# Altium PCB 7798-20-0228.PcbDoc
Units mil, origin at the board's own origin, x right, y up, seen from the top; angles counter-clockwise.
Board outline 3346.46 x 2125.98 mil, 6 copper layers (Top Signal, Ground Plane (GND), Inner Layer 1, Inner Layer 2, Power Plane (VCC), Bottom Signal), stack 51.068 mil thick; 154 components, 100 nets, 626 pads, 170 vias.
Unrouted connection lines stored in the file: 294.
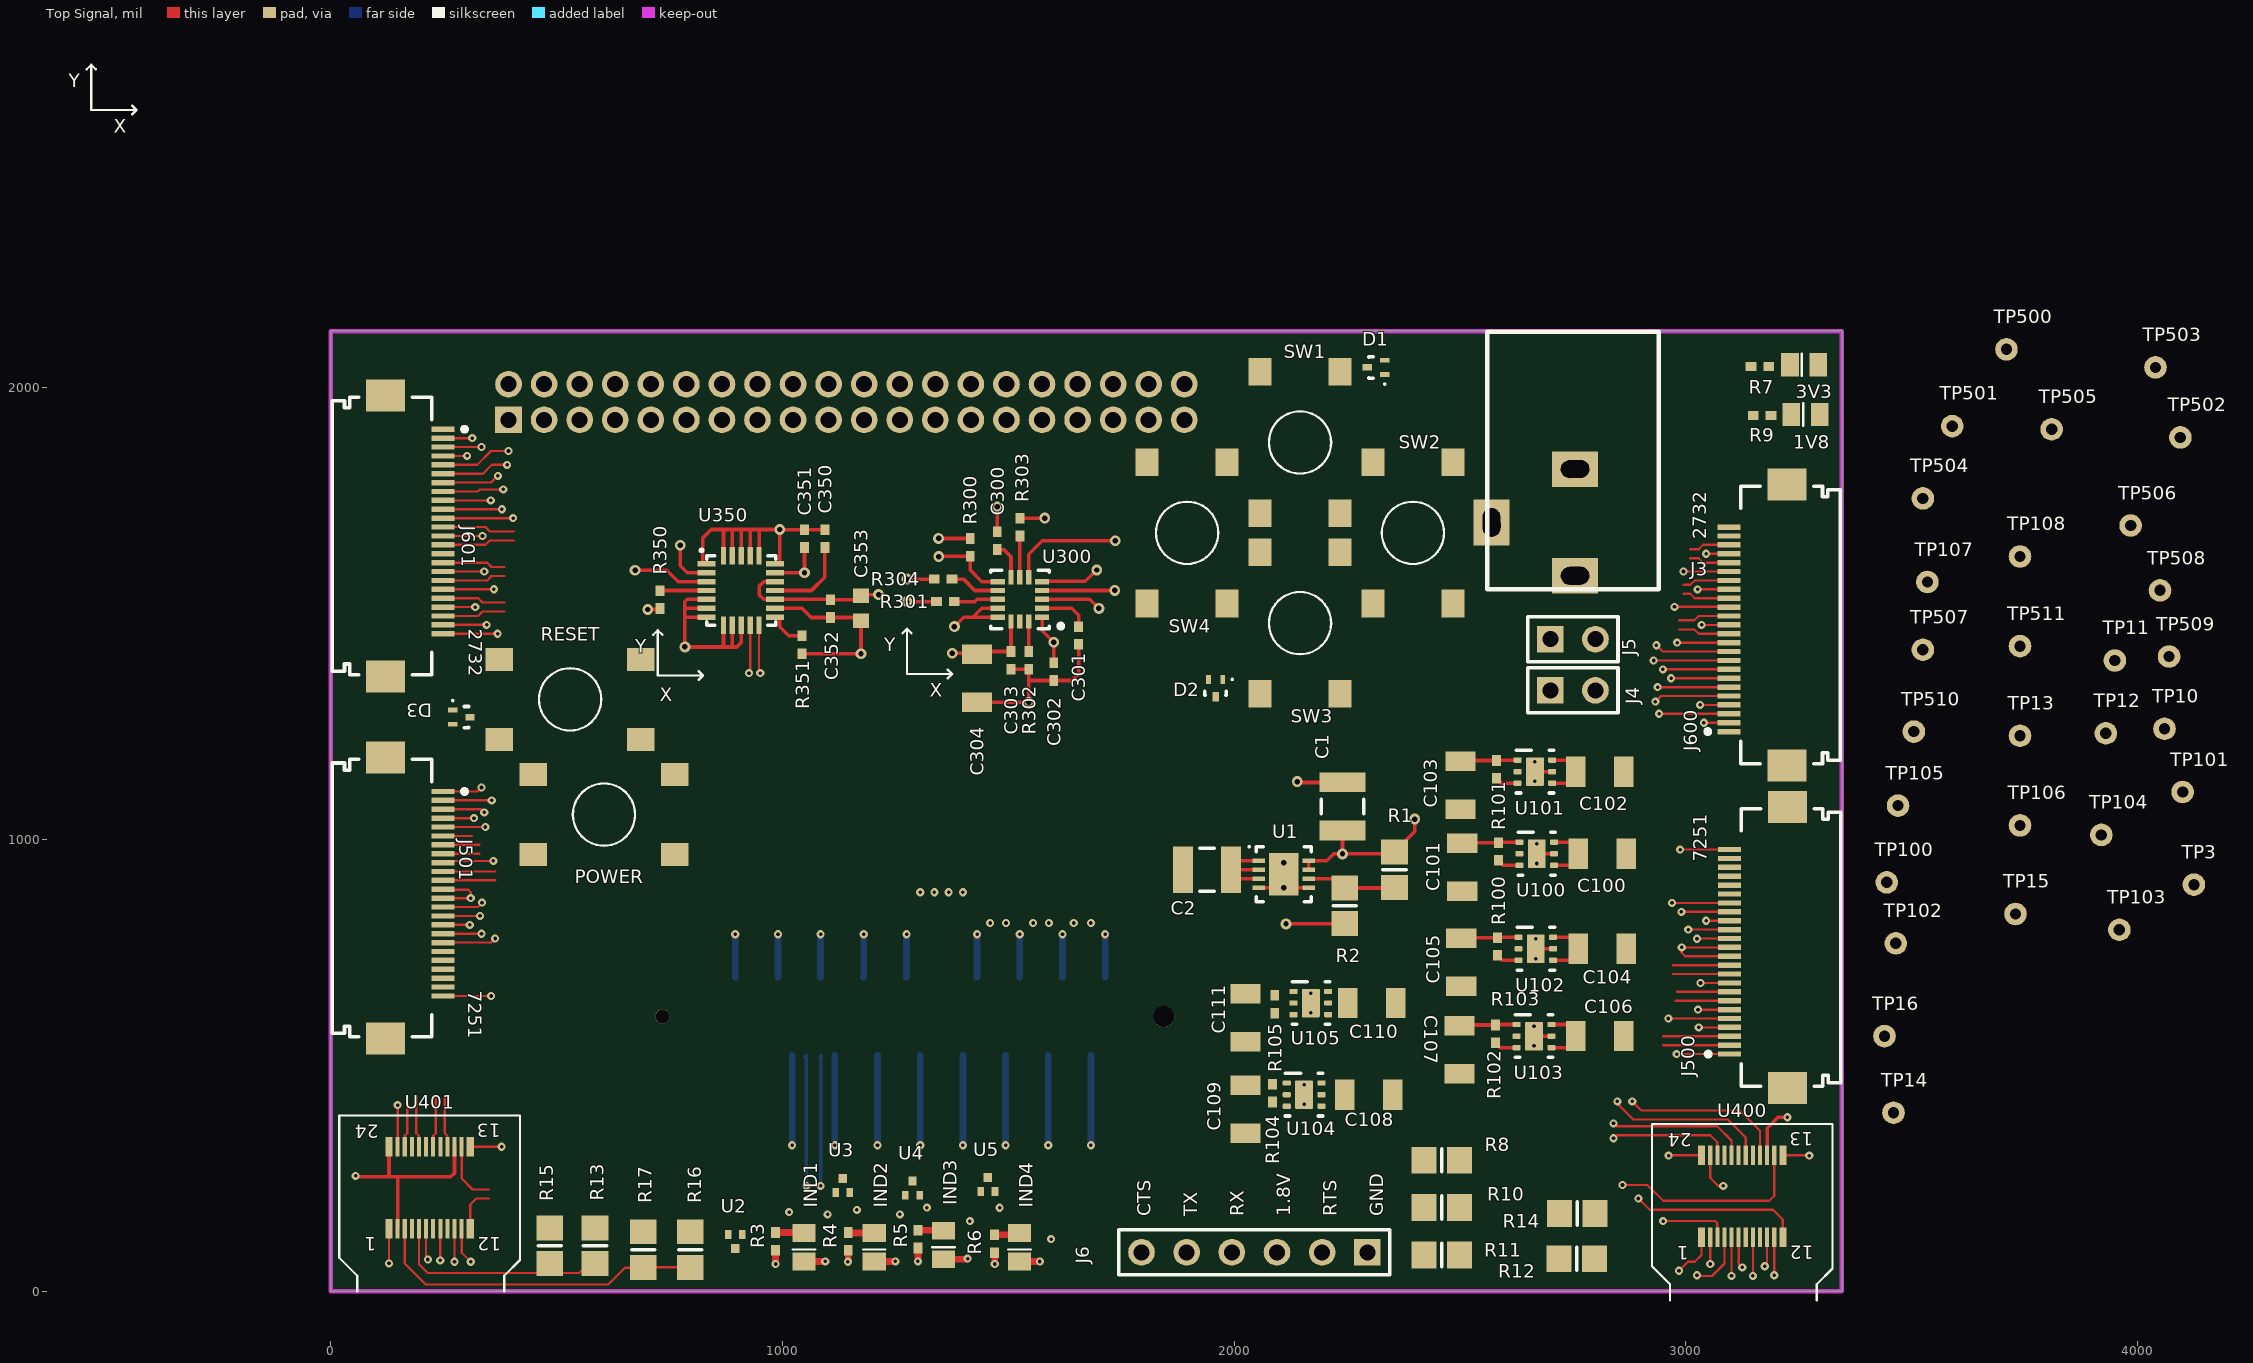
[diagram p0: Top Signal view]
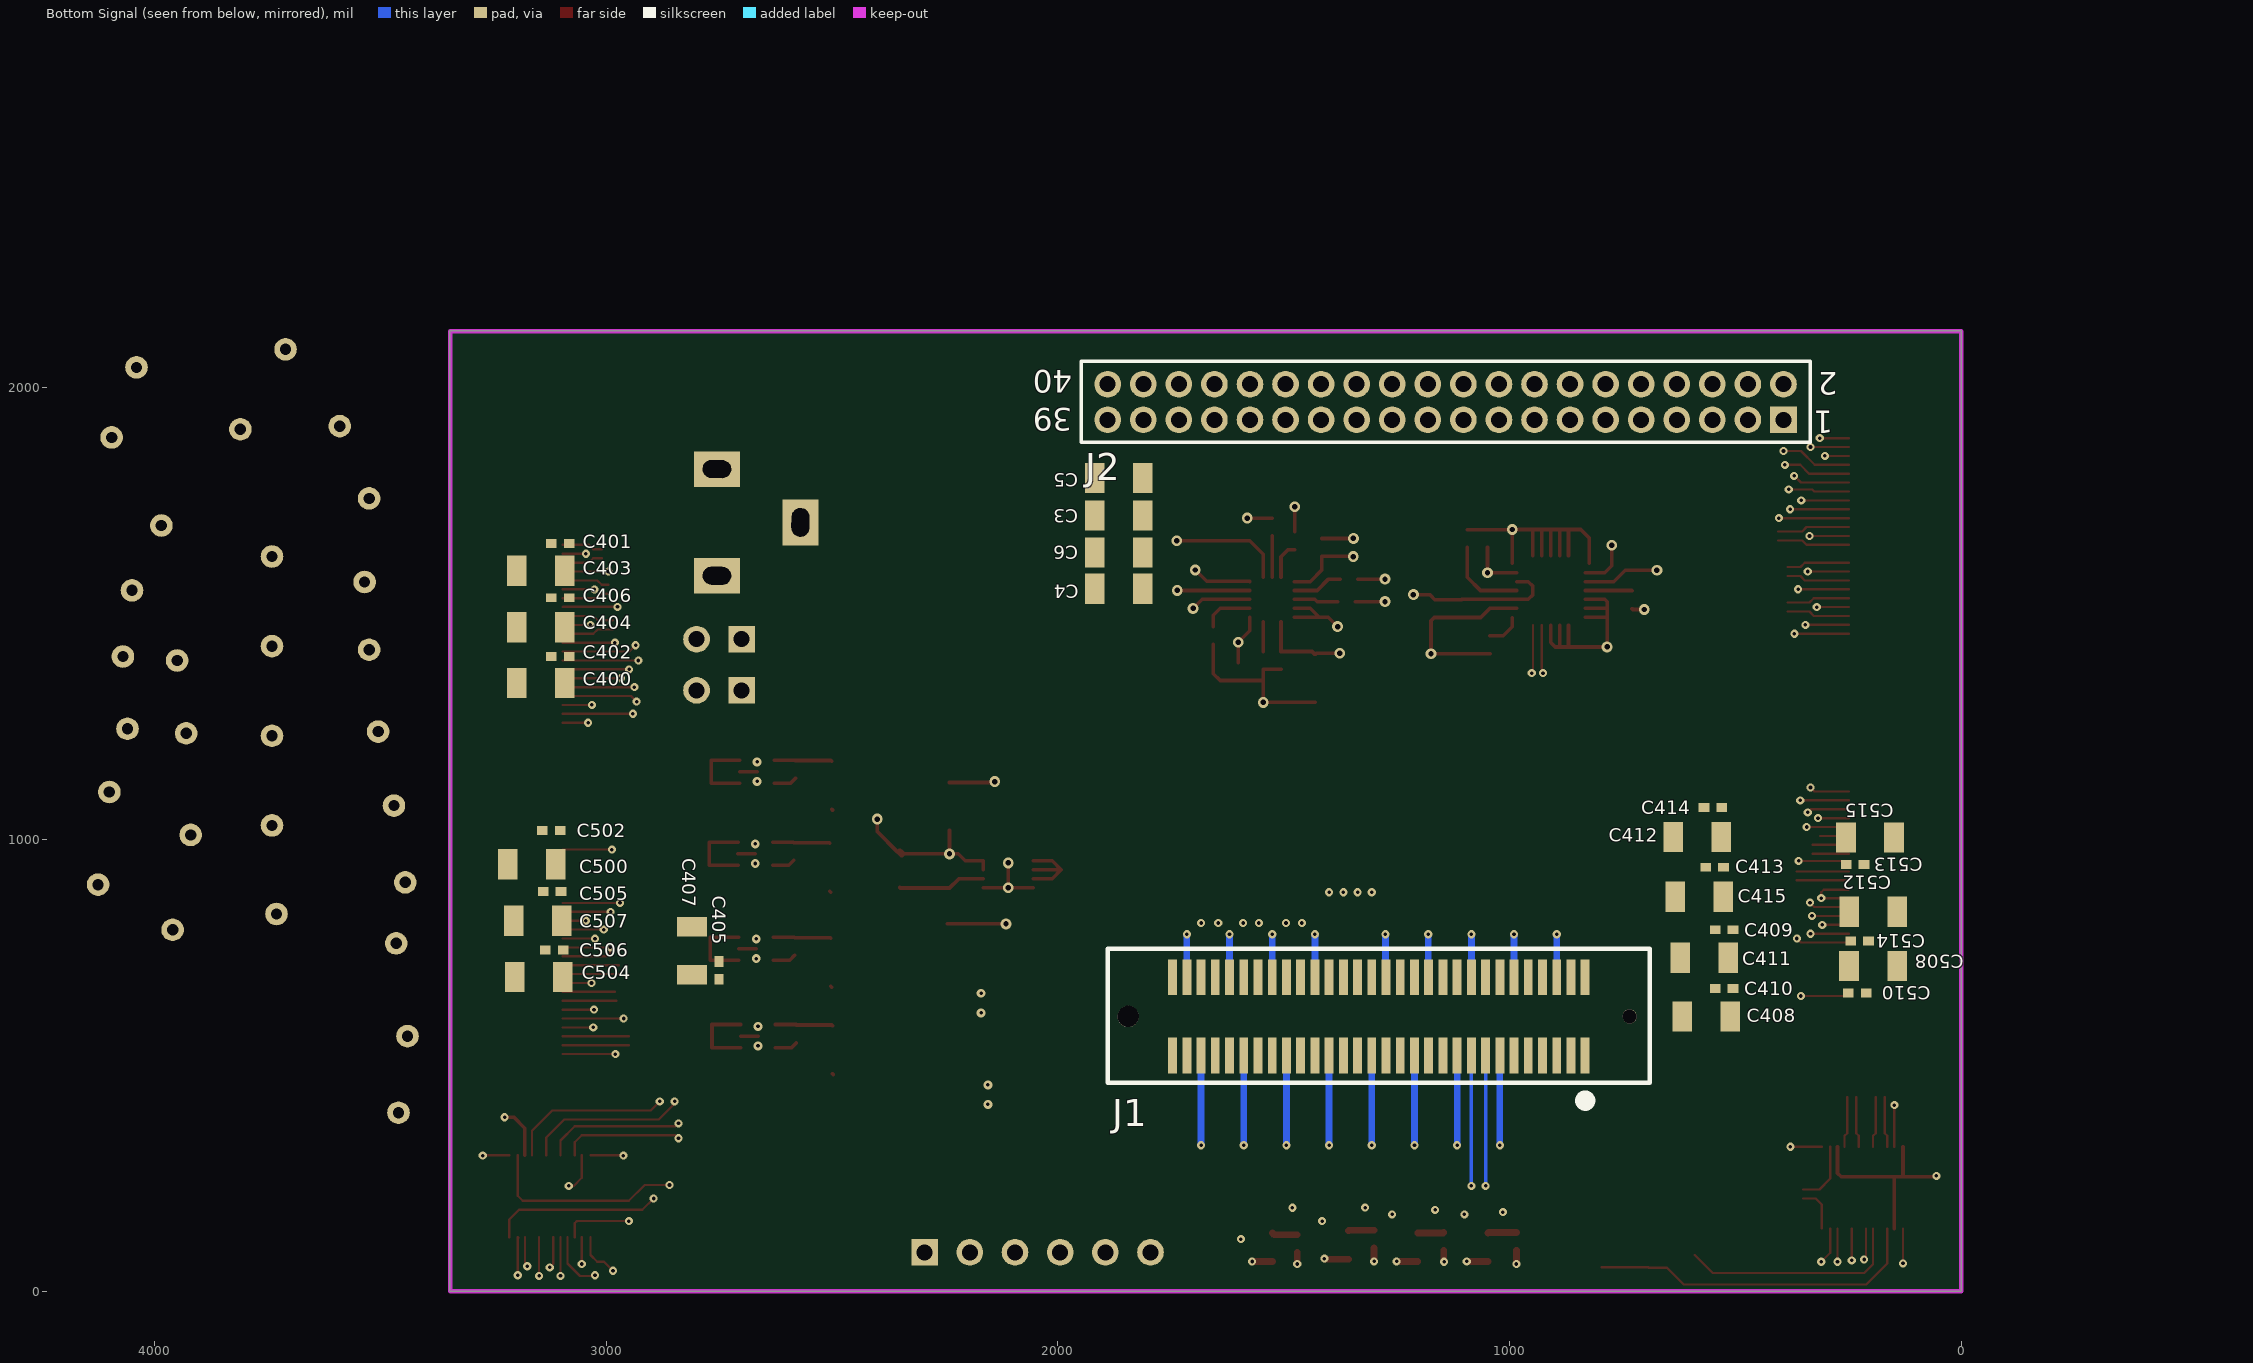
[diagram p1: Bottom Signal view, seen from below]
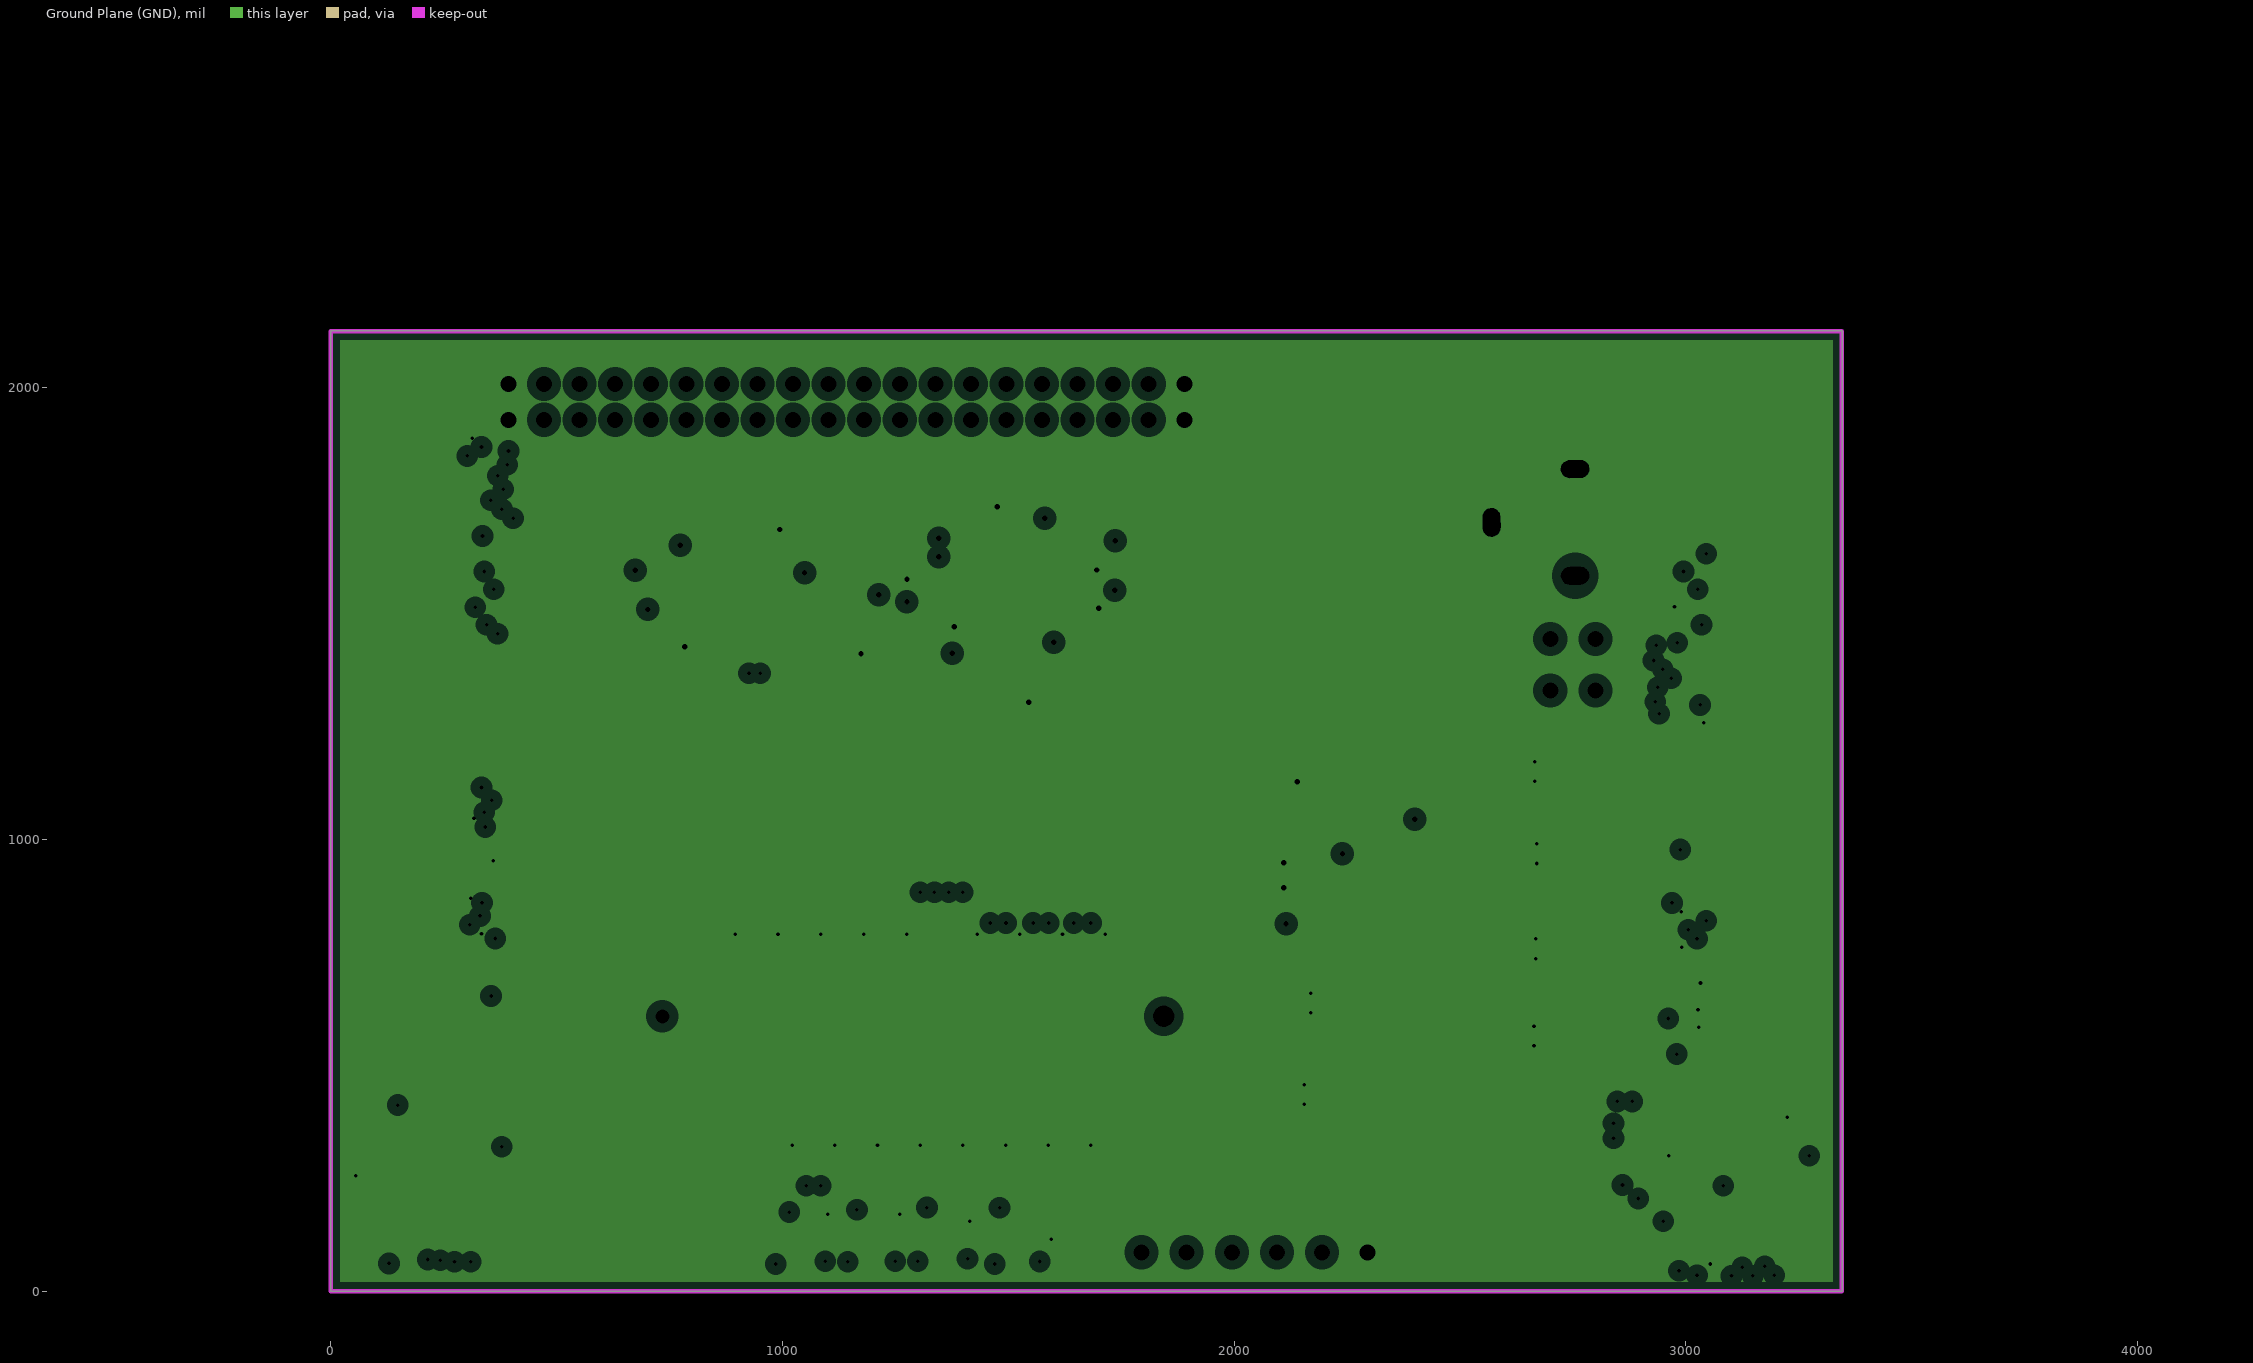
[diagram p2: Ground Plane (GND), clearances drawn from the general rule]
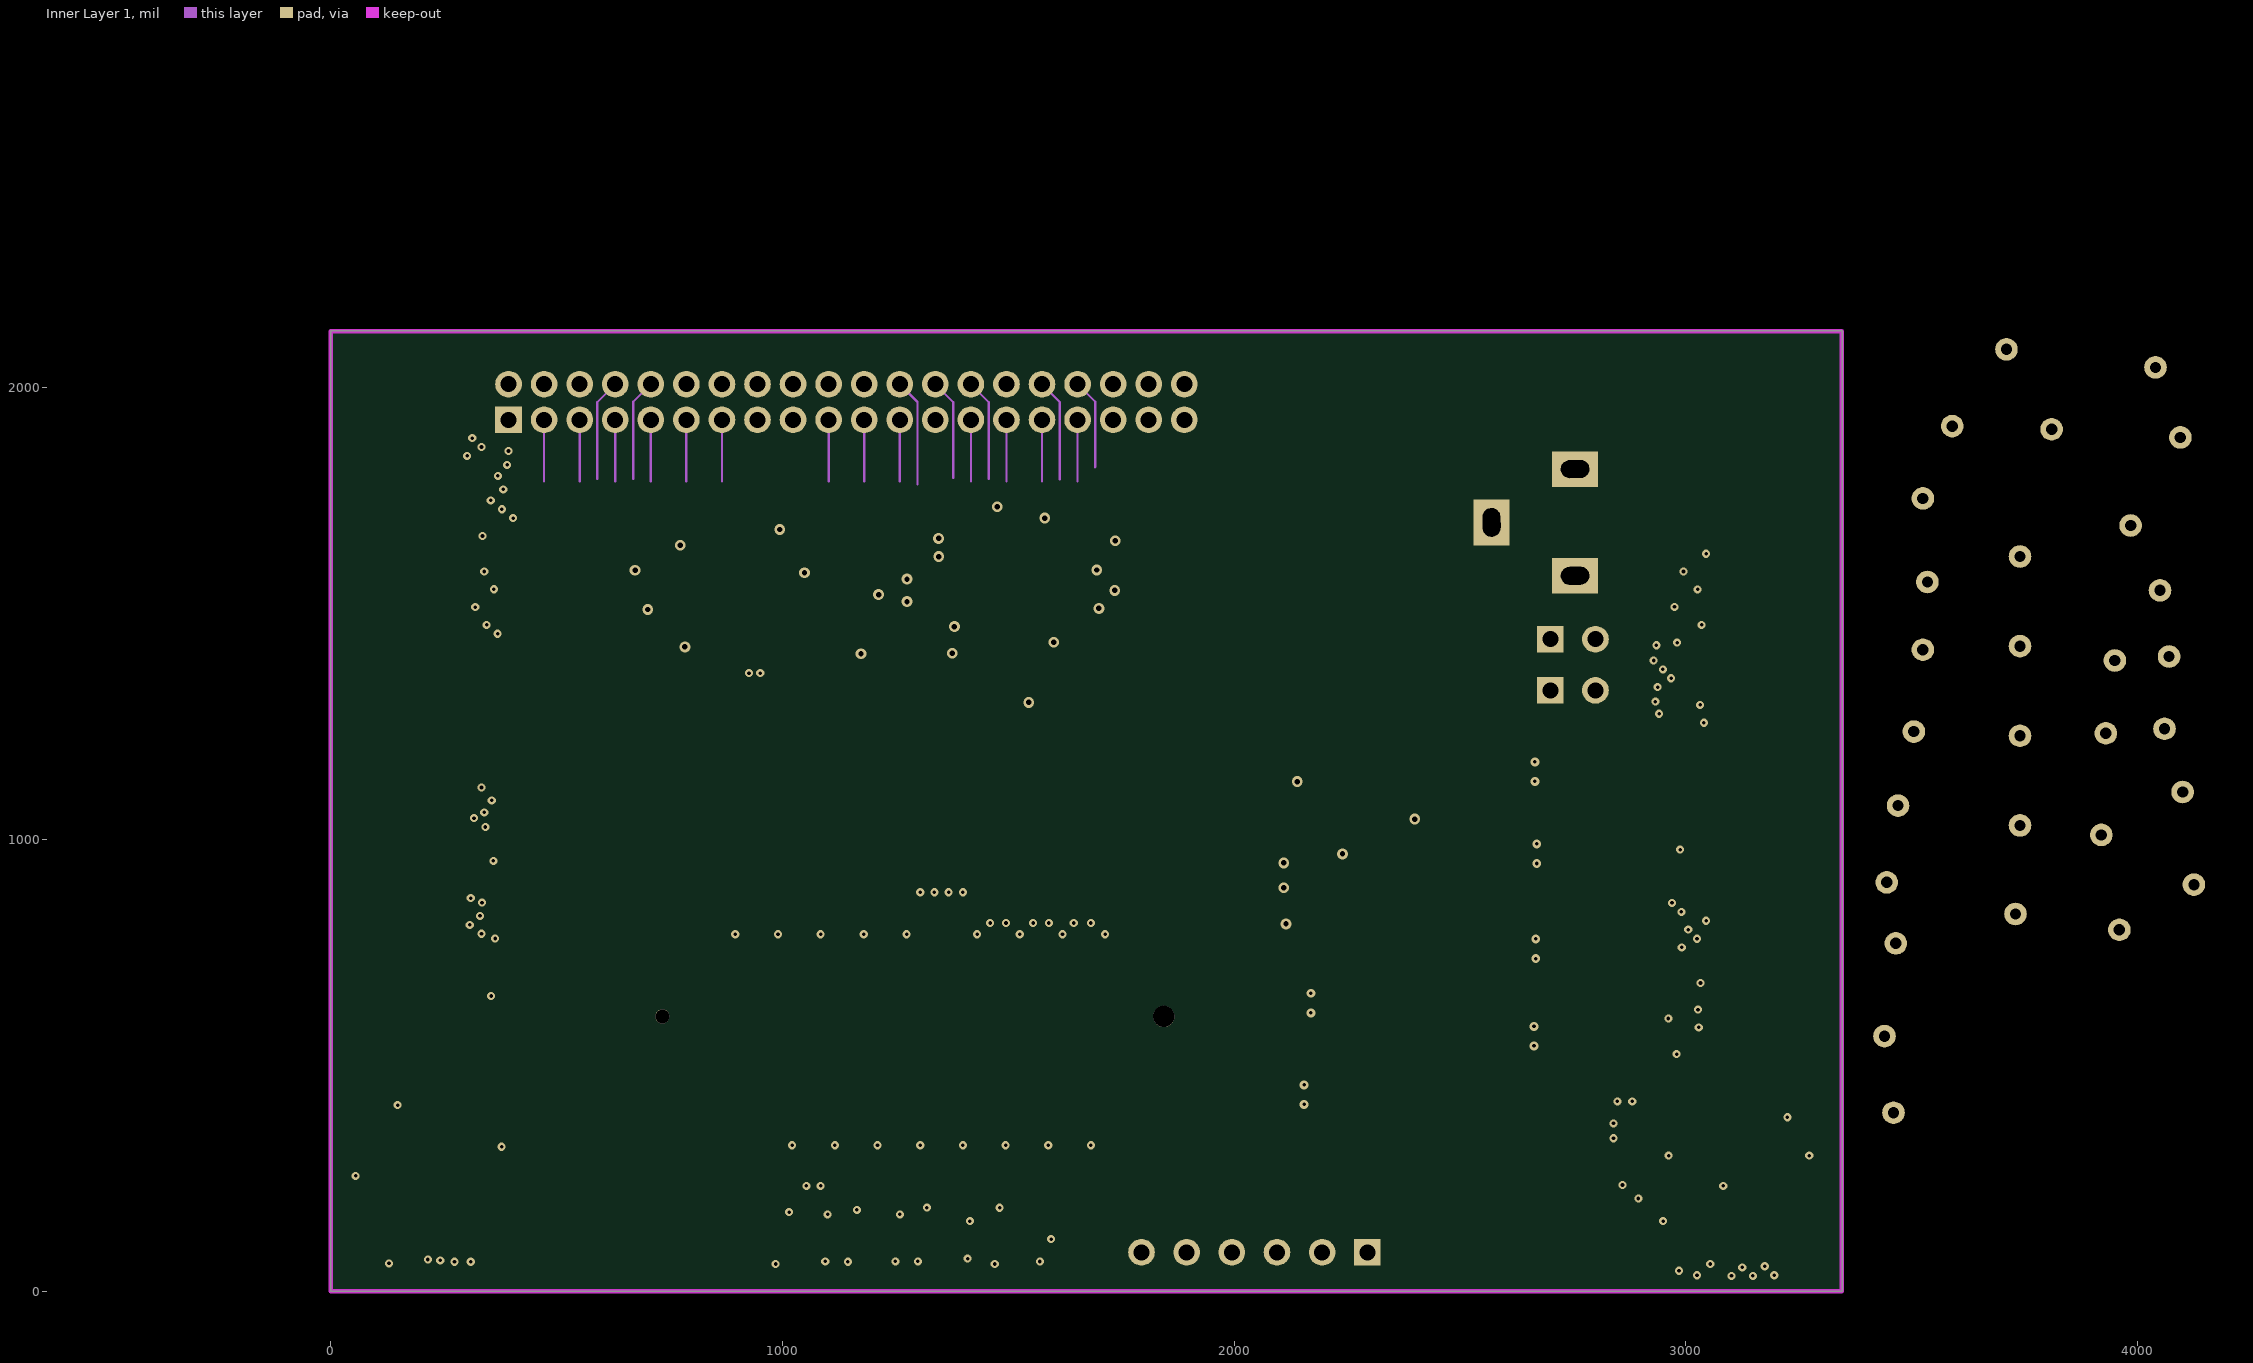
[diagram p3: Inner Layer 1]
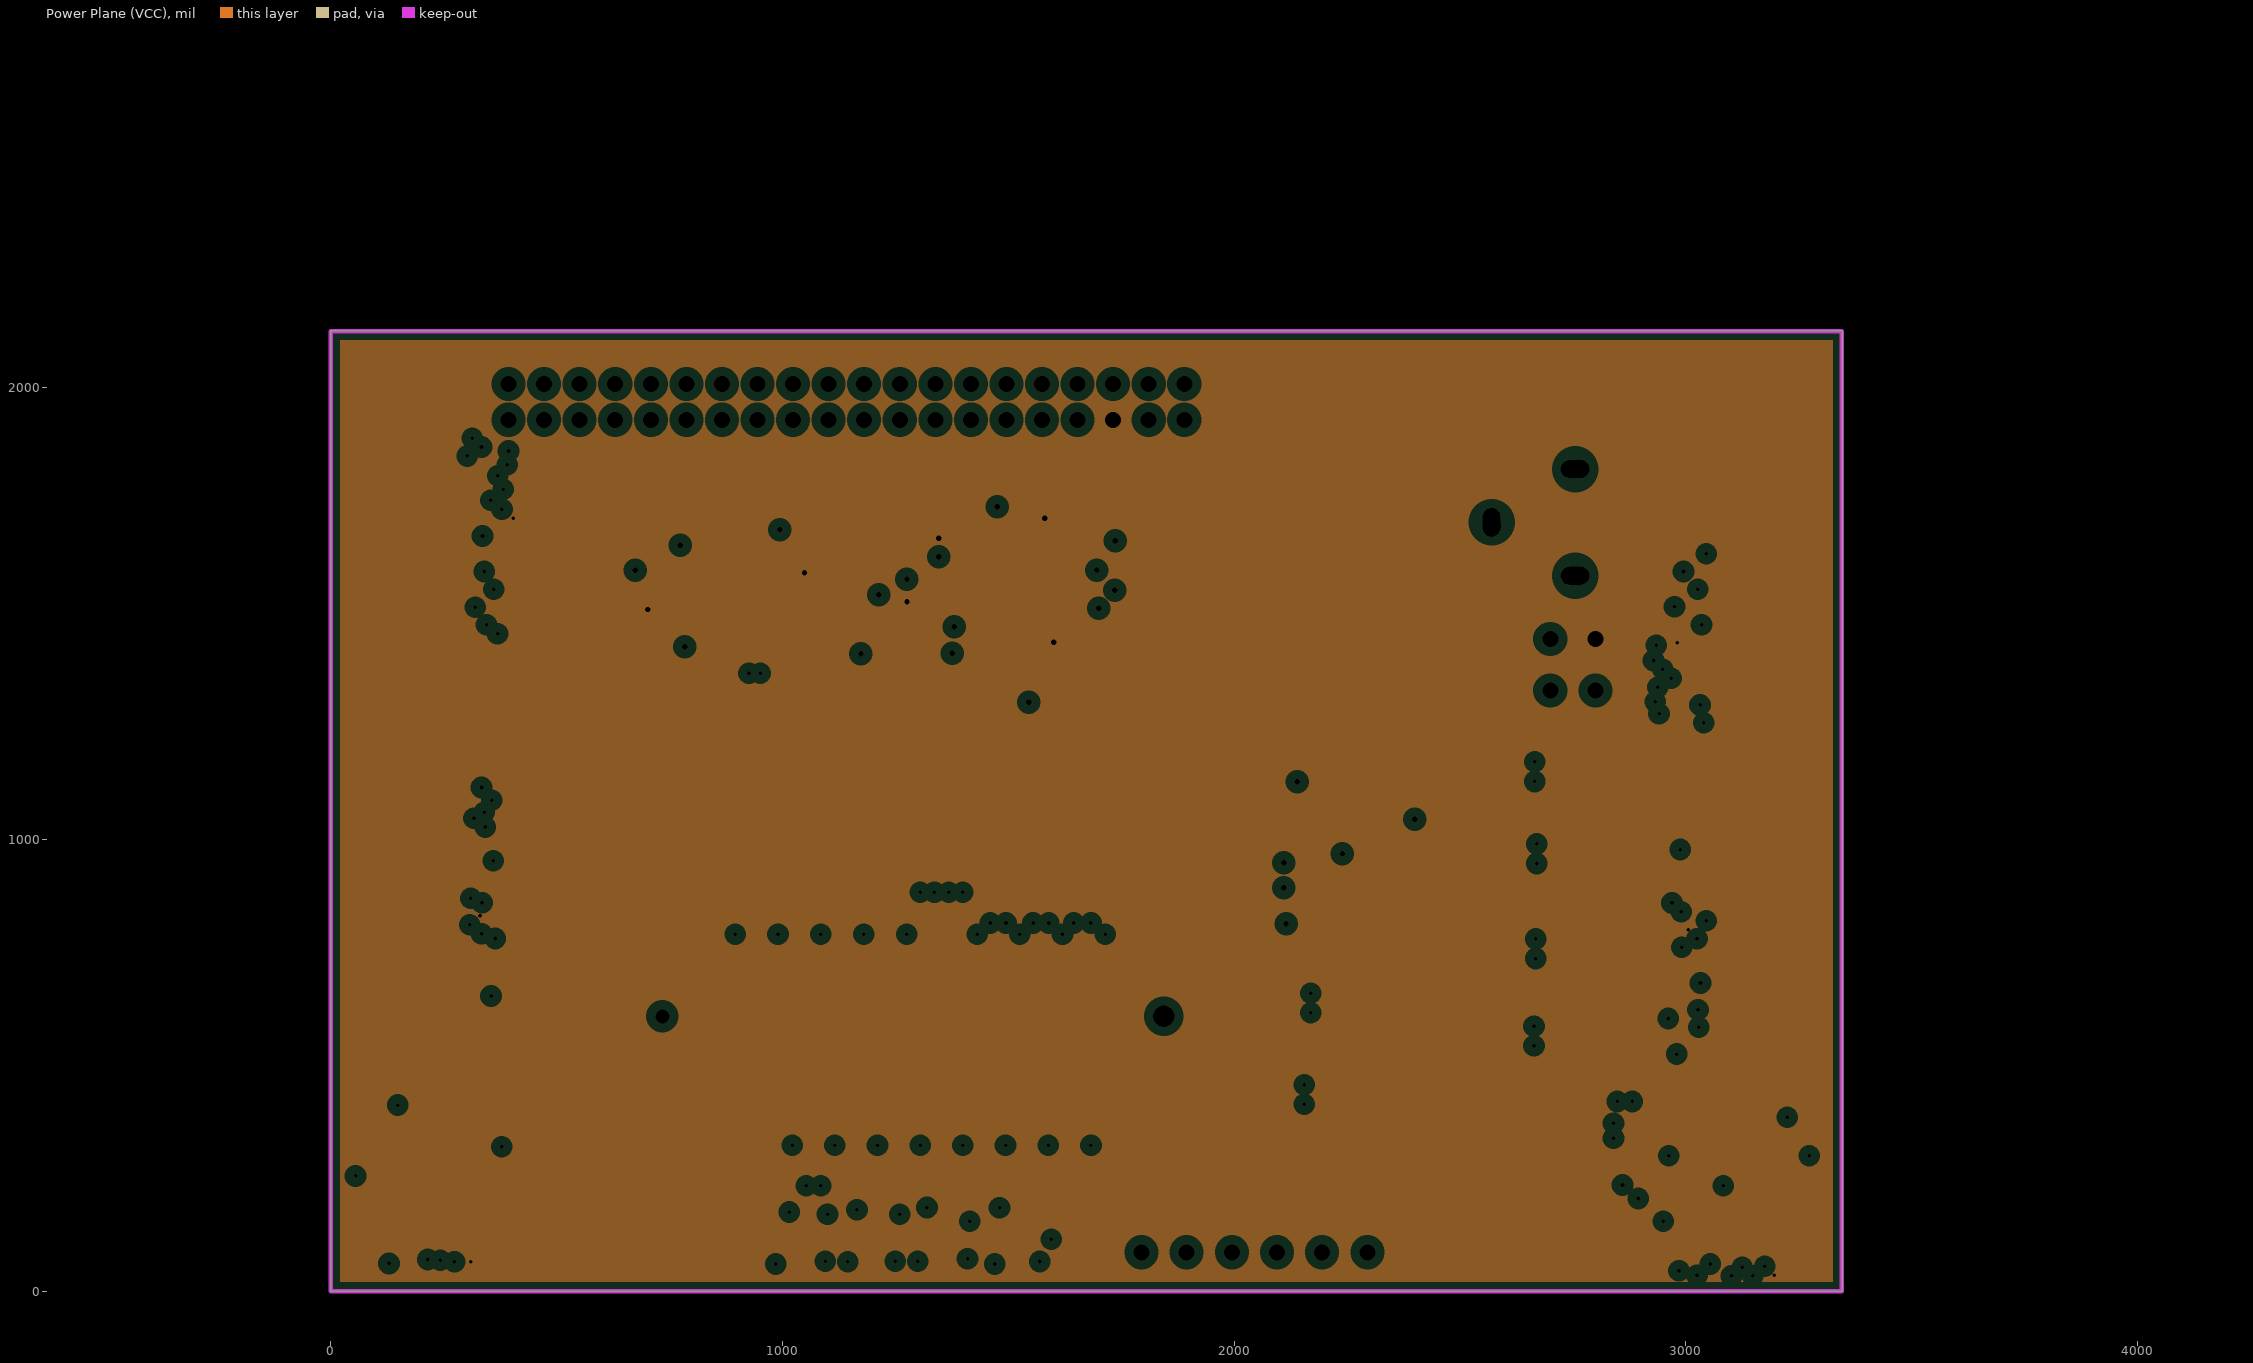
[diagram p4: Power Plane (VCC), clearances drawn from the general rule]

## Layer stack, top to bottom
Top Solder: solder mask 0.4, Solder Resist, Dk 3.5
Top Signal: signal copper 1.4
Dielectric 1: core 12.6, FR-4, Dk 4.8
Ground Plane (GND): plane copper 1.417, net sGND
Dielectric 3: prepreg 5, Dk 4.2
Inner Layer 1: signal copper 1.417
Dielectric 6: core 10, Dk 4.2
Inner Layer 2: signal copper 1.417
Dielectric 5: prepreg 5, Dk 4.2
Power Plane (VCC): plane copper 1.417, net sPWR_1V8
Dielectric 4: core 10, Dk 4.2
Bottom Signal: signal copper 1.4
Bottom Solder: solder mask 0.4, Solder Resist, Dk 3.5

## Board outline
0,0 3346.46,0 3346.46,2125.98 0,2125.98

## Design rules (kind name [scope] priority, off if disabled: settings)
AcuteAngle [All] p1: minimum=6.00000000000000E+0001 checktracksonly=FALSE
Clearance Clearance_2 [InNet('SCAM0_DATA0_N') OR InNet('SCAM0_DATA0_P') OR InNet('SCAM0_DATA1_N')OR InNet('SCAM0_DATA1_P') OR InNet('SCAM1_MCLOCK_N')OR InNet('SCAM1_MCLOCK_P') OR InNet('SCAM1_DATA0_N') OR InNet('SCAM1_DATA0_P')OR InNet('SCAM1_DATA1_N')OR InNet('SCAM1_DATA1_P') vs InNet('SCAM0_DATA0_N') OR InNet('SCAM0_DATA0_P') OR InNet('SCAM0_DATA1_N')OR InNet('SCAM0_DATA1_P') OR InNet('SCAM1_MCLOCK_N')OR InNet('SCAM1_MCLOCK_P') OR InNet('SCAM1_DATA0_N') OR InNet('SCAM1_DATA0_P')OR InNet('SCAM1_DATA1_N')OR InNet('SCAM1_DATA1_P')] p1: gap=15
Clearance Clearance_1 [(HasFootprint('SMD QFN 24_4X4MM 7/5') OR HasFootprint('FREE-QFN-16-3000X3000DE_V'))] p2: gap=8
Clearance [All] p3: gap=7
DiffPairsRouting DiffPair_SCAM0DiffPairsRouting [InDifferentialPair ('SCAM1_DATA0')] p1: maxlimit=10 minlimit=10 mostfreqgap=10 toplayer_minwidth=15 toplayer_maxwidth=15 toplayer_prefwidth=15 midlayer1_minwidth=15 midlayer1_maxwidth=15 midlayer1_prefwidth=15 midlayer2_minwidth=15 midlayer2_maxwidth=15 midlayer2_prefwidth=15 bottomlayer_minwidth=15 bottomlayer_maxwidth=15 bottomlayer_prefwidth=15 maxuncoupledlength=500
DiffPairsRouting [All] p2: maxlimit=17 minlimit=8 mostfreqgap=15 toplayer_minwidth=5 toplayer_maxwidth=10 toplayer_prefwidth=7 midlayer1_minwidth=5 midlayer1_maxwidth=10 midlayer1_prefwidth=7 midlayer2_minwidth=5 midlayer2_maxwidth=10 midlayer2_prefwidth=7 bottomlayer_minwidth=5 bottomlayer_maxwidth=10 bottomlayer_prefwidth=7 maxuncoupledlength=500
MatchedLengths DiffPair_SCAM0MatchedLengths [InDifferentialPair ('SCAM1_DATA0')] p1: tolerance=26 checknetsindiffpair=FALSE checkdiffpairvsdiffpair=TRUE checkxsignals=TRUE checkothers=TRUE
MatchedLengths [InDifferentialPairClass('All Differential Pairs')] p2: tolerance=26 checknetsindiffpair=TRUE checkdiffpairvsdiffpair=FALSE checkxsignals=FALSE checkothers=FALSE
MaxMinImpedance [InNet('SCAM0_DATA0_N') OR InNet('SCAM0_DATA0_P') OR InNet('SCAM0_DATA1_N')OR InNet('SCAM0_DATA1_P') OR InNet('SCAM1_MCLOCK_N')OR InNet('SCAM1_MCLOCK_P') OR InNet('SCAM1_DATA0_N') OR InNet('SCAM1_DATA0_P')OR InNet('SCAM1_DATA1_N')OR InNet('SCAM1_DATA1_P')] p1: minimum=10.00 maximum=110.0
MinimumAnnularRing [All] p1: minimumring=10
PlaneClearance [All] p1: clearance=20
PlaneConnect [All] p1: planeconnectstyle=Relief reliefexpansion=20 reliefentries=4 reliefconductorwidth=10 reliefairgap=10
PolygonConnect [All] p1: connectstyle=Relief reliefconductorwidth=10 reliefentries=4 polygonreliefangle="90 Angle" airgapwidth=10
RoutingVias [All] p1: holewidth=10 width=20 viastyle="Through Hole" minholewidth=8 minwidth=18 maxholewidth=12 maxwidth=24
SolderMaskExpansion [All] p1: expansion=4
Width Width_2 [InNet('SCAM0_DATA0_N') OR InNet('SCAM0_DATA0_P') OR InNet('SCAM0_DATA1_N')OR InNet('SCAM0_DATA1_P') OR InNet('SCAM1_MCLOCK_N')OR InNet('SCAM1_MCLOCK_P') OR InNet('SCAM1_DATA0_N') OR InNet('SCAM1_DATA0_P')OR InNet('SCAM1_DATA1_N')OR InNet('SCAM1_DATA1_P')] p1: maxlimit=10 minlimit=5 preferedwidth=7
Width Width_1 [InNet('sSYS_DCIN')] p2: maxlimit=30 minlimit=8 preferedwidth=8
Width [All] p3: maxlimit=15 minlimit=5 preferedwidth=8
27 further rules are at their usual default settings.

## Classes and differential pairs
differential pair SCAM0_DATA0: +SCAM0_DATA0_P -SCAM0_DATA0_N
differential pair SCAM0_DATA1: +SCAM0_DATA1_P -SCAM0_DATA1_N
differential pair SCAM1_DATA1: +SCAM1_DATA1_P -SCAM1_DATA1_N
differential pair SCAM1_MCLOCK: +SCAM1_MCLOCK_P -SCAM1_MCLOCK_N

## Components (designator, comment, footprint, x,y, rotation, side; value= is the part's Value field where it differs from the comment)
1V8 "LTST-C171GKT" 0805 3265,1941 r180 top
3V3 "LTST-C171GKT" 0805 3262,2051 r180 top
C1 "GRM32ER71H106KA12L" 1210 2240,1073 r270 top
C2 "GRM32ER71H106KA12L" 1210 1940,932.84 r0 top
C3 "GRM31CR71H475KA12L" 1206 1865,1717.28 r180 bottom
C4 "GRM31CR71H475KA12L" 1206 1865,1555 r180 bottom
C5 "GRM31CR71H475KA12L" 1206 1865,1800 r180 bottom
C6 "GRM31CR71H475KA12L" 1206 1865,1635 r180 bottom
C100 "GRM31CR71H475KA12L" 1206 2815,968.43 r180 top
C101 "GRM31CR71H475KA12L" 1206 2505,938.35 r90 top
C102 "GRM31CR71H475KA12L" 1206 2810,1150.06 r180 top
C103 "GRM31CR71H475KA12L" 1206 2501,1120.06 r90 top
C104 "GRM31CR71H475KA12L" 1206 2815,758 r180 top
C105 "GRM31CR71H475KA12L" 1206 2503,728 r90 top
C106 "GRM31CR71H475KA12L" 1206 2810,565 r180 top
C107 "GRM31CR71H475KA12L" 1206 2499,534.58 r90 top
C108 "GRM31CR71H475KA12L" 1206 2298.15,435 r180 top
C109 "GRM31CR71H475KA12L" 1206 2025,403 r90 top
C110 "GRM31CR71H475KA12L" 1206 2305,637.72 r180 top
C111 "GRM31CR71H475KA12L" 1206 2025,605.38 r90 top
C300 "GRM155R71A104KA01D" 0402 1475.79,1661.46 r90 top
C301 "GRM155R71A104KA01D" 0402 1655.79,1451.46 r270 top
C302 "GRM155R71A104KA01D" 0402 1600.79,1371.46 r90 top
C303 "GRM155R71A104KA01D" 0402 1506.1,1396.46 r90 top
C304 "GRM31CR71H475KA12L" 1206 1430.79,1356.46 r90 top
C350 "GRM155R71A104KA01D" 0402 1094,1666.15 r90 top
C351 "GRM155R71A104KA01D" 0402 1049,1666.15 r270 top
C352 "GRM155R71A104KA01D" 0402 1106.13,1511.15 r90 top
C353 "GRM188R71A105KA61J" 0603 1174,1511.78 r270 top
C400 "GRM31CR71H475KA12L" 1206 3145.12,1346.15 r0 bottom
C401 "GRM155R71A104KA01D" 0402 3101.81,1655 r180 bottom
C402 "GRM155R71A104KA01D" 0402 3101.81,1405 r180 bottom
C403 "GRM31CR71H475KA12L" 1206 3145.12,1595 r0 bottom
C404 "GRM31CR71H475KA12L" 1206 3145.12,1470 r0 bottom
C405 "GRM155R71A104KA01D" 0402 2750,710 r270 bottom
C406 "GRM155R71A104KA01D" 0402 3101.81,1535 r180 bottom
C407 "GRM31CR71H475KA12L" 1206 2810,753.15 r90 bottom
C408 "GRM31CR71H475KA12L" 1206 565,608.27 r0 bottom
C409 "GRM155R71A104KA01D" 0402 525,800 r180 bottom
C410 "GRM155R71A104KA01D" 0402 525,670 r180 bottom
C411 "GRM31CR71H475KA12L" 1206 569.18,738.31 r0 bottom
C412 "GRM31CR71H475KA12L" 1206 585,1005.37 r0 bottom
C413 "GRM155R71A104KA01D" 0402 546.18,938.31 r180 bottom
C414 "GRM155R71A104KA01D" 0402 549.96,1070.37 r180 bottom
C415 "GRM31CR71H475KA12L" 1206 580.32,873.31 r0 bottom
C500 "GRM31CR71H475KA12L" 1206 3165,945 r0 bottom
C502 "GRM155R71A104KA01D" 0402 3121.69,1020 r180 bottom
C504 "GRM31CR71H475KA12L" 1206 3149.37,695.43 r0 bottom
C505 "GRM155R71A104KA01D" 0402 3120,885 r180 bottom
C506 "GRM155R71A104KA01D" 0402 3115,755.43 r180 bottom
C507 "GRM31CR71H475KA12L" 1206 3151.85,820 r0 bottom
C508 "GRM31CR71H475KA12L" 1206 195.38,720 r180 bottom
C510 "GRM155R71A104KA01D" 0402 230.38,660 r0 bottom
C512 "GRM31CR71H475KA12L" 1206 195,840 r180 bottom
C513 "GRM155R71A104KA01D" 0402 235,944.45 r0 bottom
C514 "GRM155R71A104KA01D" 0402 225,775 r0 bottom
C515 "GRM31CR71H475KA12L" 1206 202.14,1004.45 r180 bottom
D1 "ESD7C5.0DT5G" ONSC-SOT-723-3-631AA-01_V 2314.29,2045 r180 top
D2 "ESD7C5.0DT5G" ONSC-SOT-723-3-631AA-01_V 1959,1335 r270 top
D3 "ESD7C5.0DT5G" ONSC-SOT-723-3-631AA-01_V 289.29,1270.75 r0 top
IND1 "LTST-C171GKT" 0805 1048,97 r270 top
IND2 "LTST-C171GKT" 0805 1203.33,97 r270 top
IND3 "LTST-C171GKT" 0805 1356.67,102 r270 top
IND4 "LTST-C171GKT" 0805 1525,97 r270 top
J1 "61083-064402LF" 61083-064402LF 832.68,521.65 r0 bottom locked
J2 "TMMH-120-01-F-D" HDR2X20.Metric 393.7,1929.13 r0 bottom locked
J3 "PJ-102AH" PJ-102AH 2755,1701.89 r0 top
J4 "XJ8B-0211" HDR1X2 2700,1330 r0 top
J5 "XJ8B-0211" HDR1X2 2700,1443.32 r0 top
J6 "DNP" HDR1X6 2295,86 r180 top
J500 "FH12-24S-0.5SH" FH12-24S-0.5SH 3161.02,761.02 r90 top
J501 "FH12-24S-0.5SH" FH12-24S-0.5SH 185,870 r270 top
J600 "FH12-24S-0.5SH" FH12-24S-0.5SH 3160,1475 r90 top
J601 "FH12-24S-0.5SH" FH12-24S-0.5SH 185,1671.89 r270 top
POWER "PTS645SH50SMTR92 LFS" "PTS645SH50SMTR92 LFS" 605,1055 r0 top
R1 "CRCW08050000Z0EA" 6-0805_M 2355,933 r90 top
R2 "CRCW08050000Z0EA" 6-0805_M 2245,853 r270 top
R3 "CRCW0402560RFKEDHP" 0402 985,110 r270 top
R4 "CRCW0402560RFKEDHP" 0402 1145.79,110 r270 top
R5 "CRCW0402560RFKEDHP" 0402 1300,115 r270 top
R6 "CRCW0402560RFKEDHP" 0402 1470,105 r270 top
R7 "CRCW0402560RFKEDHP" 0402 3164,2047 r180 top
R8 "CRCW08050000Z0EA" 6-0805_M 2460,290 r0 top
R9 "CRCW040256R0FKED" 0402 3169,1939 r180 top
R10 "CRCW08050000Z0EA" 6-0805_M 2460,185 r0 top
R11 "CRCW08050000Z0EA" 6-0805_M 2460,80 r0 top
R12 "CRCW08050000Z0EA" 6-0805_M 2759,72 r0 top
R13 "CRCW08050000Z0EA" 6-0805_M 585,100.63 r270 top
R14 "CRCW08050000Z0EA" 6-0805_M 2760,172 r0 top
R15 "CRCW08050000Z0EA" 6-0805_M 485,100.63 r270 top
R16 "CRCW08050000Z0EA" 6-0805_M 796,92 r270 top
R17 "CRCW08050000Z0EA" 6-0805_M 692,92 r270 top
R100 "CRCW040210K0FKEDHP" 0402 2585,973.35 r270 top
R101 "CRCW040210K0FKEDHP" 0402 2581,1155.06 r270 top
R102 "CRCW040210K0FKEDHP" 0402 2583,763 r270 top
R103 "CRCW040210K0FKEDHP" 0402 2579,569.58 r270 top
R104 "CRCW040210K0FKEDHP" 0402 2085,438.5 r270 top
R105 "CRCW040210K0FKEDHP" 0402 2090,635 r270 top
R300 "CRCW040210K0FKED" 0402 1415.79,1646.46 r270 top
R301 "CRCW040210K0FKED" 0402 1360.79,1526.46 r0 top
R302 "CRCW040210K0FKED" 0402 1545.47,1396.46 r90 top
R303 "CRCW040210K0FKED" 0402 1525.79,1691.46 r90 top
R304 "CRCW040210K0FKED" 0402 1355.79,1576.46 r180 top
R350 "CRCW040210K0FKED" 0402 729,1530.83 r90 top
R351 "CRCW040210K0FKED" 0402 1043.37,1431.15 r270 top
RESET "PTS645SH50SMTR92 LFS" "PTS645SH50SMTR92 LFS" 530,1310.17 r180 top
SW1 "PTS645SH50SMTR92 LFS" "PTS645SH50SMTR92 LFS" 2146,1878.89 r90 top
SW2 "PTS645SH50SMTR92 LFS" "PTS645SH50SMTR92 LFS" 2396,1678.89 r90 top
SW3 "PTS645SH50SMTR92 LFS" "PTS645SH50SMTR92 LFS" 2146,1478.89 r90 top
SW4 "PTS645SH50SMTR92 LFS" "PTS645SH50SMTR92 LFS" 1896,1678.89 r90 top
TP3 "TP" TP_TH 4125,900 r90 top
TP10 "TP" TP_TH 4060,1245 r90 top
TP11 "TP" TP_TH 3950,1396.26 r90 top
TP12 "TP" TP_TH 3930,1235 r90 top
TP13 "TP" TP_TH 3740,1229.5 r90 top
TP14 "TP" TP_TH 3460,395 r90 top
TP15 "TP" TP_TH 3730,835 r90 top
TP16 "TP" TP_TH 3440,564.58 r90 top
TP100 "TP" TP_TH 3445,905 r90 top
TP101 "TP" TP_TH 4100,1105 r90 top
TP102 "TP" TP_TH 3465,770 r90 top
TP103 "TP" TP_TH 3960,800 r90 top
TP104 "TP" TP_TH 3920,1010 r90 top
TP105 "TP" TP_TH 3470,1075 r90 top
TP106 "TP" TP_TH 3740,1031 r90 top
TP107 "TP" TP_TH 3535,1570 r90 top
TP108 "TP" TP_TH 3740,1626.5 r90 top
TP500 "TP" TP_TH 3710,2085 r90 top
TP501 "TP" TP_TH 3590,1915 r90 top
TP502 "TP" TP_TH 4095,1890 r90 top
TP503 "TP" TP_TH 4040,2045 r90 top
TP504 "TP" TP_TH 3525,1755 r90 top
TP505 "TP" TP_TH 3810,1908.11 r90 top
TP506 "TP" TP_TH 3985,1695 r90 top
TP507 "TP" TP_TH 3525,1420 r90 top
TP508 "TP" TP_TH 4050,1551.46 r90 top
TP509 "TP" TP_TH 4070,1405 r90 top
TP510 "TP" TP_TH 3505,1238.78 r90 top
TP511 "TP" TP_TH 3740,1428 r90 top
U1 "LT1965EDD-3.3#TRPBF" "LT-DD-8_V - MOD" 2110,923 r0 top
U2 "RUM002N05T2L" RUM002N05T2L 895.67,110 r180 top
U3 "RUM002N05T2L" RUM002N05T2L 1133.58,234 r0 top
U4 "RUM002N05T2L" RUM002N05T2L 1288,228 r0 top
U5 "RUM002N05T2L" RUM002N05T2L 1455,236 r0 top
U100 "LP5912-1.5" DRV0006A 2670,968.35 r0 top
U101 "LP5912-1.5" DRV0006A 2666,1150.06 r0 top
U102 "LP5912-2.8" DRV0006A 2668,758 r0 top
U103 "LP5912-2.8" DRV0006A 2664,564.58 r0 top
U104 "LP5912-1.2" DRV0006A 2155,435 r0 top
U105 "LP5912-1.2" DRV0006A 2170,637.72 r0 top
U300 "FXOS8700CQR1" FREE-QFN-16-3000X3000DE_V 1525.79,1531.46 r180 top
U350 "FXAS21002C" "SMD QFN 24_4X4MM 7/5" 909,1551.15 r0 top
U400 "AXK724147G" AXK724147G 3125,210 r180 top
U401 "AXK724147G" AXK724147G 219,229 r180 top

## Footprints (in the part's own frame and the unit in brackets; to place one, negate y for a bottom-side part, rotate by r counter-clockwise, add the part's x,y. Pads: shape width x height; smd on the part's side, far side on the other; paste and mask are expansions set on the pad)
6-0805_M [mm] "Chip Resistor, Body 2.0x1.2mm, IPC Low Density"
  rect 1.4x1.5 smd: 1(-1,0) 2(1,0)
  silkscreen extent 0,-0.65 0,0.65, body extent -1.07,-0.7 1.07,0.7, height 0.7
0402 [mm] "Chip Capacitor, Body 1.0x0.5mm, IPC High Density"
  rect 0.6x0.5 smd: 1(-0.5,0) 2(0.5,0)
  body extent -0.55,-0.3 0.55,0.3, height 1.3
0603 [mm] "Chip Capacitor, Body 1.6x0.8mm, IPC High Density"
  rect 0.8x0.9 smd: 1(-0.7,0) 2(0.7,0)
  body extent -0.87,-0.48 0.87,0.48, height 1.3
0805 [mm]
  rect 1x1.3 smd: 1(-0.8,0) 2(0.8,0)
  silkscreen extent 0.13,-0.64 0.13,0.64, body extent -1.07,-0.64 1.07,0.76, height 0.7
1206 [mm] "Chip Capacitor, Body 3.2x1.6mm, IPC High Density"
  rect 1.1x1.7 smd: 1(-1.35,0) 2(1.35,0)
  body extent -1.7,-0.9 1.7,0.9, height 1.3
1210 [mm] "Chip Capacitor, Body 3.2x2.5mm, IPC High Density"
  rect 1.1x2.6 smd: 1(-1.35,0) 2(1.35,0)
  silkscreen extent -0.4,-1.2 0.4,1.2, body extent -1.7,-1.35 1.7,1.35, height 1.3
61083-064402LF [mm] "2x30 pin metric"
  round 0.8 hole 0.8 unplated: 0(-2.5,-2.2)
  round 1.2 hole 1.2 unplated: 0(25.7,-2.2)
  rect 0.5x2 smd: 1(0,0) 2(0,-4.4) 3(0.8,0) 4(0.8,-4.4) 5(1.6,0) 6(1.6,-4.4) 7(2.4,0) 8(2.4,-4.4) 9(3.2,0) 10(3.2,-4.4) 11(4,0) 12(4,-4.4) 13(4.8,0) 14(4.8,-4.4) 15(5.6,0) 16(5.6,-4.4) 17(6.4,0) 18(6.4,-4.4) 19(7.2,0) 20(7.2,-4.4) 21(8,0) 22(8,-4.4) 23(8.8,0) 24(8.8,-4.4) 25(9.6,0) 26(9.6,-4.4) 27(10.4,0) 28(10.4,-4.4) 29(11.2,0) 30(11.2,-4.4) 31(12,0) 32(12,-4.4) 33(12.8,0) 34(12.8,-4.4) 35(13.6,0) 36(13.6,-4.4) 37(14.4,0) 38(14.4,-4.4) 39(15.2,0) 40(15.2,-4.4) 41(16,0) 42(16,-4.4) 43(16.8,0) 44(16.8,-4.4) 45(17.6,0) 46(17.6,-4.4) 47(18.4,0) 48(18.4,-4.4) 49(19.2,0) 50(19.2,-4.4) 51(20,0) 52(20,-4.4) 53(20.8,0) 54(20.8,-4.4) 55(21.6,0) 56(21.6,-4.4) 57(22.4,0) 58(22.4,-4.4) 59(23.2,0) 60(23.2,-4.4)
  silkscreen extent -3.64,-6.01 26.84,2.79, body extent -3.3,-5.16 26.5,0.84, height 7.75
AXK724147G [mm]
  rect 0.4x1.1 smd: 1(2.285,2.3) 12(-2.285,2.3) 13(-2.285,-2.3) 24(2.285,-2.3)
  rect 0.23x1.1 smd: 2(1.8,2.3) 3(1.4,2.3) 4(1,2.3) 5(0.6,2.3) 6(0.2,2.3) 7(-0.2,2.3) 8(-0.6,2.3) 9(-1,2.3) 10(-1.4,2.3) 11(-1.8,2.3) 14(-1.8,-2.3) 15(-1.4,-2.3) 16(-1,-2.3) 17(-0.6,-2.3) 18(-0.2,-2.3) 19(0.2,-2.3) 20(0.6,-2.3) 21(1,-2.3) 22(1.4,-2.3) 23(1.8,-2.3)
  body extent -3.55,-2.55 3.55,2.55, height 1.5
DRV0006A [mm]
  rrect33% 0.45x0.3 smd: 1(-0.975,0.65) 2(-0.975,0) 3(-0.975,-0.65) 4(0.975,-0.65) 5(0.975,0) 6(0.975,0.65)
  rrect14% 1x0.7 on Top Paste: 7(0,-0.45) 7(0,0.45)
  rrect10% 1x1.6 smd paste-0.5: 7(0,0)
  silkscreen extent -1.05,-1.2 1.05,1.2, body extent -1.05,-1.05 1.05,1.05, height 0.81
FH12-24S-0.5SH [mm]
  rect 1.8x2.2 smd: 0(-7.9,-1.625) 0(7.9,-1.625)
  rect 0.3x1.3 smd: 1(-6,1.625) 2(-5.5,1.625) 3(-5,1.625) 4(-4.5,1.625) 5(-4,1.625) 6(-3.5,1.625) 7(-3,1.625) 8(-2.5,1.625) 9(-2,1.625) 10(-1.5,1.625) 11(-1,1.625) 12(-0.5,1.625) 13(0,1.625) 14(0.5,1.625) 15(1,1.625) 16(1.5,1.625) 17(2,1.625) 18(2.5,1.625) 19(3,1.625) 20(3.5,1.625) 21(4,1.625) 22(4.5,1.625) 23(5,1.625) 24(5.5,1.625)
  silkscreen extent -7.8,-4.62 7.8,2.95, body extent -8.3,-4.19 7.8,2.21, height 2.14
FREE-QFN-16-3000X3000DE_V [mm] "QFN, 16-Leads, Body 3.00x3.00mm, Pitch 0.50mm"
  rect 0.8x0.3 smd: 1(-1.25,1) 2(-1.25,0.5) 3(-1.25,0) 4(-1.25,-0.5) 5(-1.25,-1) 9(1.25,-1) 10(1.25,-0.5) 11(1.25,0) 12(1.25,0.5) 13(1.25,1)
  rect 0.3x0.8 smd: 6(-0.5,-1.25) 7(0,-1.25) 8(0.5,-1.25) 14(0.5,1.25) 15(0,1.25) 16(-0.5,1.25)
  silkscreen extent -2.43,-1.65 1.65,1.65, body extent -1.5,-1.5 1.5,1.5, height 1.25
HDR1X2 [mm] "Connector; Header; 2 Position"
  rect 1.5x1.5 hole 0.9: 1(0,0)
  round 1.5 hole 0.9: 2(2.54,0)
  silkscreen extent -1.27,-1.27 3.81,1.27
HDR1X6 [mm] "Connector; Header; 6 Position"
  rect 1.5x1.5 hole 0.9: 1(0,0)
  round 1.5 hole 0.9: 2(2.54,0) 3(5.08,0) 4(7.62,0) 5(10.16,0) 6(12.7,0)
  silkscreen extent -1.27,-1.27 13.97,1.27
HDR2X20.Metric [mm] "Connector; Header; 2x20 Position"
  rect 1.5x1.5 hole 0.9: 1(0,0)
  round 1.5 hole 0.9: 2(0,-2) 3(2,0) 4(2,-2) 5(4,0) 6(4,-2) 7(6,0) 8(6,-2) 9(8,0) 10(8,-2) 11(10,0) 12(10,-2) 13(12,0) 14(12,-2) 15(14,0) 16(14,-2) 17(16,0) 18(16,-2) 19(18,0) 20(18,-2) 21(20,0) 22(20,-2) 23(22,0) 24(22,-2) 25(24,0) 26(24,-2) 27(26,0) 28(26,-2) 29(28,0) 30(28,-2) 31(30,0) 32(30,-2) 33(32,0) 34(32,-2) 35(34,0) 36(34,-2) 37(36,0) 38(36,-2) 39(38,0) 40(38,-2)
  silkscreen extent -1.5,-3.3 39.5,1.27, body extent -1.02,-3.05 38.98,0.94, height 5.31
"LT-DD-8_V - MOD" [mm] "SON, 8-Leads, Body 3x3mm, Pitch 0.5mm, Thermal Pad 1.65x2.38 mm, IPC Low Density"
  rect 0.7x0.25 smd mask+0.102: 1(-1.4,0.75) 2(-1.4,0.25) 3(-1.4,-0.25) 4(-1.4,-0.75) 5(1.4,-0.75) 6(1.4,-0.25) 7(1.4,0.25) 8(1.4,0.75)
  rect 1.65x2.38 smd mask+0.102: 9(0,0)
  silkscreen extent -2,-1.55 1.55,1.6, body extent -1.48,-1.52 1.52,1.48, height 0.8
ONSC-SOT-723-3-631AA-01_V [mm] "SOT223, 3-Leads, Body 1.2x0.8mm, Pitch 0.4mm"
  rect 0.52x0.27 smd: 1(-0.49,0.4) 2(-0.49,-0.4)
  rect 0.52x0.36 smd: 3(0.49,0)
  silkscreen extent -0.54,-0.6 0.4,0.98, body extent -0.4,-0.6 0.4,0.6, height 0.55
PJ-102AH [mm] "2.1 mm DC POWER JACK"
  rect 2.6x2 hole 1 slot 1.6 at 1 deg: 1(0,-3) 2(0,3)
  rect 2x2.6 hole 1 slot 1.6 at 91 deg: 3(-4.7,0)
  silkscreen extent -4.95,-3.76 4.7,10.72, body extent -4.83,-3.72 4.57,10.68, height 11.5
"PTS645SH50SMTR92 LFS" [mm] "SWITCH TACTILE SPST-NO 0.05A 12V"
  rect 1.55x1.3 smd: 1(-3.975,2.25) 2(3.975,2.25) 3(-3.975,-2.25) 4(3.975,-2.25)
  silkscreen extent -1.75,-1.75 1.75,1.75, body extent -4.57,-3 4.43,3, height 4.1
RUM002N05T2L [mm]
  rect 0.37x0.5 smd: 1(-0.4,-0.4) 2(0.4,-0.4)
  rect 0.47x0.5 smd: 3(0,0.4)
  body extent -0.64,-0.56 0.61,0.49, height 0.45
"SMD QFN 24_4X4MM 7/5" [mm]
  rect 1x0.3 smd: 1(-1.95,1.5) 2(-1.95,1) 3(-1.95,0.5) 4(-1.95,0) 5(-1.95,-0.5) 6(-1.95,-1) 7(-1.95,-1.5) 13(1.9,-1.5) 14(1.9,-1) 15(1.9,-0.5) 16(1.9,0) 17(1.9,0.5) 18(1.9,1) 19(1.9,1.5)
  rect 0.3x1 smd: 8(-1,-1.95) 9(-0.5,-1.95) 10(0,-1.95) 11(0.5,-1.95) 12(1,-1.95) 20(1,1.95) 21(0.5,1.95) 22(0,1.95) 23(-0.5,1.95) 24(-1,1.95)
  silkscreen extent -2.27,-1.95 1.95,2.3, body extent -2,-2.01 2.01,2, height 0.9
TP_TH [mil]
  round 50 hole 25: 1(0,0)

## Part data
1V8 3V3 IND1 IND2 IND3 IND4: "LED"
C1 C2: library part GRM32ER71HxxxKdddd, "-55-125C, 1005, 50V, X7R, ±10%"
C3 C4 C5 C6 C100 C101 C102 C103 C104 C105 C106 C107 C108 C109 C110 C111 C304 C400 C403 C404 C407 C408 C411 C412 C415 C500 C504 C507 C508 C512 C515: library part GRM31CR71HxxxKdddd, "-55-125C, 3216, 50V, X7R, ±10%"
C300 C301 C302 C303 C350 C351 C352 C401 C402 C405 C406 C409 C410 C413 C414 C502 C505 C506 C510 C513 C514: library part GRM155R71AxxxKdddd, "-55-125C, 1005, 10V, X7R, ±10%"
C353: library part GRM188R71AxxxKdddd, "-55-125C, 1608, 10V, X7R, ±10%"
D1 D2 D3: library part CMP-1063-00208-1, "Transient Voltage Suppressor, Micro-Packaged Diode for ESD Protection, 3-Pin SOT-723, Pb-Free, Tape and Reel"
J2: "Header, 2x20-Pin, Dual row, Metric"
J3: "Low Voltage Power Supply Connector, 2.1 mm"
J4 J5: library part "Header 2", "Header, 2-Pin"
J6: library part "Header 6", "Header, 6-Pin"
J500 J501 J600 J601: "ONN FFC BOTTOM 24POS 0.50MM R/A"
POWER RESET SW1 SW2 SW3 SW4: "Tactile Switch"
R1 R2 R8 R10 R11 R12 R13 R14 R15 R16 R17: library part Res3, "0O Resistor"
R3 R4 R5 R6 R7 R9 R100 R101 R102 R103 R104 R105 R300 R301 R302 R303 R304 R350 R351: library part CRCW0402xxxxFKED, "0.125W, -55-155C, 1005, 50V, ±1%"
U1: "1.1 A, Low Noise, Low Dropout Linear Regulator, 1.8 to 20 V Vin, 3.3 V Vout, 8-pin SON (DD-8), -40 to 125 degC, Pb-Free, Tape and Reel"
U2 U3 U4 U5: "MOSFET N-CH 50V 0.2A 3VMT"
U100 U101 U102 U103 U104 U105: library part LP5912-x.x, "500-mA Low-Noise, Low-IQ LDO"
U300: library part CMP-2000-05129-1, "6-Axis Xtrinsic Sensor with Integrated Linear Accelerometer and Magnetometer, 1.95 to 3.6 V, -40 to 85 degC, 16-Pin QFN, RoHS, Tape and Reel"
U350: "3-Axis Digital Angular Rate  Gyroscope"
U400 U401: "CONN SOCKET P4 .4MM 24POS SMD"

## Via types
v1: diameter 18, hole 8, Top Signal to Bottom Signal, 130 vias
v2: diameter 24, hole 12, Top Signal to Bottom Signal, 28 vias
v3: diameter 19.68, hole 7.87, Top Signal to Bottom Signal, 12 vias

## Nets (pads, with @x,y where several pads share a name; then routed paths per layer and width w, separated by ;. In a path a pad name is that pad's centre, name@x,y a point inside that pad or via, vN(x,y) a via of type N, cw(c..) or ccw(c..) an arc to the next point about the centre after c; other vN are vias at no path point)
Net1V8_1: 1V8.1 J5.1
Net1V8_2: 1V8.2 R9.1
Net3V3_1: 3V3.1 J4.1
Net3V3_2: 3V3.2 R7.1
NetC300_1: C300.1 U300.8 | length 82.3
  Top Signal w8: C300.1 1476.1,1641.46 1490.79,1641.46 1506.1,1626.15 U300.8
NetC301_1: C301.1 U300.2 | length 112.4
  Top Signal w8: U300.2 1640.47,1511.78 1655.79,1496.46 C301.1
NetC350_1: C350.1 U350.16 | length 188.3
  Top Signal w8: U350.16 1064.63,1551.15 1094,1580.52 C350.1
NetIND1_1: IND1.1 R3.1 | length 63.5
  Top Signal w15: R3.1 1046.81,129.68 IND1.1
NetIND1_2: IND1.2 U2.3 | length 47.1
  Top Signal w15: IND1.2 1094.72,65.5 v1(1095,65.79)
NetIND2_1: IND2.1 R4.1 | length 58
  Top Signal w15: R4.1 1146.98,128.5 IND2.1
NetIND2_2: IND2.2 U3.3 | length 46.8
  Top Signal w15: IND2.2 1249.72,65.5 v1(1250,65.79)
NetIND3_1: IND3.1 R5.1 | length 57.2
  Top Signal w15: R5.1 1355.48,134.68 IND3.1
NetIND3_2: IND3.2 U4.3 | length 54
  Top Signal w15: IND3.2 1408.5,70.5 v1(1410,72)
NetIND4_1: IND4.1 R6.1 | length 56.6
  Top Signal w15: R6.1 1521.19,124.68 IND4.1
NetIND4_2: IND4.2 U5.3 | length 45
  Top Signal w15: IND4.2 v1(1570,65.5)
NetJ6_3: J6.3 R11.1
NetJ6_4: J6.4 R10.1 | length 7.1
  Bottom Signal w15: J6.4@1990,91 J6.4
NetJ6_5: J6.5 R8.1
NetJ600_9: J600.9 TP505.1 | length 167.3
  Top Signal w5: v1(2928.74,1396.26) J600.9
NetJ600_17: J600.17 TP504.1 | length 69.8
  Top Signal w5: v1(3026.26,1553.74) J600.17
NetJ600_19: J600.19 TP503.1 | length 101
  Top Signal w5: v1(2995.04,1593.11) J600.19
NetJ600_21: J600.21 TP502.1 | length 51
  Top Signal w5: v1(3045.04,1632.48) J600.21
NetJ600_23: J600.23 TP501.1
NetJ600_24: J600.24 TP500.1
NetJ601_9: J601.9 TP511.1 | length 105.4
  Top Signal w5: J601.9 v1(354.37,1750.63)
NetJ601_17: J601.17 TP510.1 | length 91
  Top Signal w5: J601.17 v1(339.96,1593.15)
NetJ601_19: J601.19 TP509.1 | length 112.2
  Top Signal w5: J601.19 v1(361.22,1553.78)
NetJ601_21: J601.21 TP508.1 | length 71
  Top Signal w5: J601.21 v1(319.96,1514.41)
NetJ601_23: J601.23 TP507.1 | length 96.1
  Top Signal w5: J601.23 v1(345.04,1475.04)
NetJ601_24: J601.24 TP506.1 | length 120.4
  Top Signal w5: J601.24 v1(369.41,1455.35)
NetR1_1: R1.1 R2.1 U1.6 | length 194
  Top Signal w8: U1.6 2219.21,913.16 2240,892.37 R2.1 2348.74,892.37 R1.1@2350,893.63
NetR100_2: R100.2 U100.3 | length 51.1
  Top Signal w8: R100.2 2595.91,942.76 U100.3
NetR101_2: R101.2 U101.3 | length 51.1
  Top Signal w8: R101.2 2591.91,1124.47 U101.3
NetR102_2: R102.2 U102.3 | length 51.1
  Top Signal w8: R102.2 2593.91,732.41 U102.3
NetR103_2: R103.2 U103.3 | length 51.1
  Top Signal w8: R103.2 2589.91,538.99 U103.3
NetR104_2: R104.2 U104.3
NetR105_2: R105.2 U105.3
NetR302_2: R302.2 U300.16 | length 66.1
  Top Signal w8: R302.2 U300.16
NetR350_2: R350.2 U350.4 | length 103.5
  Top Signal w8: R350.2 729.63,1551.15 U350.4
sAG_SA0: R303.1 U300.7 | length 91.1
  Top Signal w8: U300.7 R303.1
sAG_SA1: R304.1 U300.10 | length 111.6
  Top Signal w8: R304.1 1400.79,1576.46 1426.1,1551.15 U300.10
SCAM0_DATA0_N: J1.10 J1.44 J500.10 J501.10 J600.20 J601.20 U400.22 U401.22 | length 851.5
  Top Signal w5: U401.22 163.88,343.7 169.63,349.45 169.63,430 ; J501.10 364.06,929.06 ; J601.20 326.44,1534.09 336.12,1524.41 385,1524.41 ; v1(2840,338.5) 2846.5,345 3054.29,345 3069.88,329.41 U400.22 ; 2971.42,701.97 J500.10 ; 3010,1622.48 3028.88,1622.48 3038.56,1612.8 J600.20
  other v1: 1495,815
SCAM0_DATA0_P: J1.8 J1.42 J500.11 J501.11 J600.22 J601.22 U400.20 U401.20 | length 893.8
  Top Signal w5: 189.63,430 189.63,349.45 195.38,343.7 U401.20 ; J501.11 364.37,909.37 ; J601.22 326.44,1494.72 336.12,1504.41 385,1504.41 ; v1(2840,371.5) 2846.5,365 3070,365 3101.38,333.62 U400.20 ; 2971.65,721.65 J500.11 ; 3010,1642.48 3028.88,1642.48 3038.56,1652.17 J600.22
  other v1: 1460,815
SCAM0_DATA1_N: J1.16 J600.12 U400.14 | length 559.6
  Top Signal w5: v1(2860,235) 2915,235 2950,200 3185,200 3195.87,210.87 U400.14 ; 2985,1465 3018.88,1465 3028.56,1455.31 J600.12
SCAM0_DATA1_P: J1.14 J600.14 U400.12 | length 493.2
  Top Signal w5: v1(2895,205) 2920,180 3193.28,180 3214.96,158.32 U400.12 ; 2985,1485 3018.8,1485 3028.48,1494.68 J600.14
sCAM0_SCL: J500.3 J600.5 R12.2 TP11.1 U400.5 | length 401.3
  Top Signal w5: v1(2932.8,1305) 2945.32,1317.52 J600.5 ; 2950,564.17 J500.3 ; v1(3101.38,33.62) U400.5
sCAM0_SDA: J500.2 J600.3 R14.2 TP12.1 U400.3 | length 454.7
  Top Signal w5: v1(2940.94,1278.15) J600.3 ; v1(2950,155) 2950.12,155.12 3064.76,155.12 3069.88,150 U400.3 ; 2950,544.49 J500.2
SCAM1_DATA1_N: J1.50 J601.14 U401.14 | length 300.6
  Top Signal w5: J601.14 342.59,1652.2 352.27,1661.89 405,1661.89 ; U401.14 289.87,249.09 313.96,225 350,225
  other v1: 1590,815
SCAM1_DATA1_P: J1.48 J601.12 U401.12 | length 259.9
  Top Signal w5: J601.12 342.59,1691.57 352.27,1681.89 405,1681.89 ; U401.12 308.96,191.8 317.17,200 317.24,200 322.24,205 350,205
  other v1: 1555,815
SCAM1_MCLOCK_N: J1.4 J1.56 J500.7 J501.7 J600.16 J601.16 U400.18 U401.18 | length 917.2
  Top Signal w5: U401.18 226.87,343.7 232.62,349.45 232.62,430 ; J501.7 328.74,988.11 ; J601.16 346.44,1612.83 356.12,1603.15 385,1603.15 ; v1(2848.5,420) 2848.5,415.52 2884.02,380 3092.87,380 3132.87,340 U400.18 ; 2977.09,642.91 J500.7 ; 2995.04,1543.74 3010.1,1543.74 3019.78,1534.06 J600.16
  other v1: 1683.07,815
SCAM1_MCLOCK_P: J1.2 J1.54 J500.8 J501.8 J600.18 J601.18 U400.16 U401.16 | length 918.5
  Top Signal w5: J501.8 329.06,968.43 ; J601.18 346.44,1573.46 356.12,1583.15 385,1583.15 ; 252.62,430 252.62,349.45 258.37,343.7 U401.16 ; v1(2881.5,420) 2901.5,400 3119.37,400 3164.37,355 U400.16 ; 2980.71,662.6 J500.8 ; 2995.04,1563.74 3010.1,1563.74 3019.78,1573.43 J600.18
  other v1: 1645,815
sCAM1_SCL: J501.3 J601.5 R13.2 R15.2 TP10.1 U401.5 | length 756.5
  Top Signal w5: U401.5 195.38,59.62 215,40 550,40 R13.2@590,80 ; J501.3 333.15,1066.85 v1(340,1060) v1@345,1065 ; J601.5 324.37,1829.37 355,1860 v1(393.7,1860)
sCAM1_SDA: J501.2 J601.3 R16.2 R17.2 TP13.1 U401.3 | length 936.9
  Top Signal w5: U401.3 163.88,61.12 210.5,14.5 614.5,14.5 651.63,51.63 692,51.63 693,52.63 R16.2 ; J501.2 v1(356.54,1086.54) ; J601.3 v1(333.74,1868.74)
sCSI0_XCLOCK/sCAM0_XCLOCK: J1.15 J500.5 J600.13 U400.13 | length 548.5
  Top Signal w5: v1(2961.46,603.54) J500.5 ; v1(3035,1475.04) v1(3035,1475.04) J600.13 ; U400.13 3272.95,300.55 v1(3273.5,300)
  Bottom Signal w8: J1.15@1050,518.5 J1.15 v1(1053.15,233)
sCSI1_XCLOCK/sCAM1_XCLOCK: J1.17 J501.5 J601.13 U401.13 | length 547.7
  Top Signal w5: J501.5 v1(342.48,1027.48) ; J601.13 v1(336.11,1671.89) ; U401.13 v1(378.4,319.55)
  Bottom Signal w8: J1.17@1083,515.3 J1.17@1084.65,516.94 ; v1(1084.65,233) J1.17@1084.65,516.94 ; J1.17@1084.65,516.94 1087,519.3 J1.17 J1.17@1084.65,516.94
sGND: C1.1 C2.1 C3.1 C4.1 C5.1 C6.1 C100.1 C101.1 C102.1 C103.1 C104.1 C105.1 C106.1 C107.1 C108.1 C109.1 C110.1 C111.1 C300.2 C301.2 C302.1 C303.1 C304.1 C350.2 C351.1 C352.1 C353.2 C400.2 C401.1 C402.1 C403.2 C404.2 C405.1 C406.1 C407.2 C408.2 C409.1 C410.1 C411.2 C412.2 C413.1 C414.1 C415.2 C500.2 C502.1 C504.2 C505.1 C506.1 C507.2 C508.2 C510.1 C512.2 C513.1 C514.1 C515.2 D1.3 D2.3 D3.3 J1.6 J1.12 J1.13 J1.18 J1.19 J1.24 J1.25 J1.30 J1.31 J1.37 J1.40 J1.43 J1.46 J1.49 J1.52 J1.55 J1.58 J2.1 J2.2 J2.39 J2.40 J3.2 J3.3 J6.1 J500.4 J500.6 J500.9 J500.12 J500.13 J500.17 J501.4 J501.6 J501.9 J501.12 J501.13 J501.17 J600.2 J600.15 J601.2 J601.15 POWER.1 POWER.2 R7.2 R9.2 R302.1 R304.2 R351.2 RESET.1 RESET.2 SW1.1 SW1.2 SW2.1 SW2.2 SW3.1 SW3.2 SW4.1 SW4.2 TP16.1 TP105.1 TP106.1 U1.4 U1.5 U1.9 U2.2 U3.2 U4.2 U5.2 U100.5 U100.7@2670,968.35 U101.5 U101.7@2666,1150.06 U102.5 U102.7@2668,758 U103.5 U103.7@2664,564.58 U104.5 U104.7@2155,435 U105.5 U105.7@2170,637.72 U300.3 U300.5 U300.12 U300.13 U350.1 U350.5 U350.6 U350.7 U350.8 U350.9 U350.10 U350.14 U350.19 U350.20 U350.21 U350.22 U350.23 U350.24 U400.2 U400.15 U400.24 U401.2 U401.15 U401.24 | length 7408.4
  Top Signal w5: J501.17 v1(333.74,791.26) ; J501.13 v1(310,870) 310,883.14 304.5,888.65 250.02,888.65 J501.12 ; J501.9 252.76,952.53 v1(360,952.53) ; J501.6 312.8,1007.8 ; J501.4 v1(317.17,1047.17) ; J601.2 v1(313.43,1888.43) ; v1(2962,300) 2962.55,300.55 U400.24 ; v1(2975,1515) 3095.39,1515 J600.15 ; v1(2990.24,839.76) J500.17 ; v1(3027.17,623.23) J500.6 ; v1(3028.86,583.86) J500.4 ; v1(3032.72,682.28) J500.9 ; v1(3040.18,1258.46) J600.2 ; U400.2 v1(3054.29,60) ; J500.12 2998.66,741.34 2991.02,748.98 v1(2991.02,761.02) J500.13
  Top Signal w8: v1(55,255) 57,253 129,253 ; U401.24 129.04,253.04 129,253 ; U401.2 148.13,252.87 148,253 ; U401.15 274.12,261.12 266,253 148,253 ; U350.1@824,1611.15 824,1667.92 842.23,1686.15 869.63,1686.15 ; U350.7 784.94,1492.09 784,1491.15 ; U350.6 784.63,1511.78 784,1511.15 ; U350.5 789.32,1531.46 784,1526.15 784,1511.15 ; U350.8 869.63,1426.78 869,1426.15 ; U350.24 869.63,1686.15 ; U350.9 889.32,1426.46 889,1426.15 ; U350.23 889.32,1686.15 ; U350.10 909,1436.15 899,1426.15 889,1426.15 ; U350.22 909,1686.15 ; U350.21 928.68,1686.15 ; U350.20 948.37,1686.15 ; U350.14 1043.37,1511.78 1063.68,1491.46 C352.1 1166.76,1491.46 C353.2 v2(1174,1411.15) 1173.69,1411.46 R351.2 ; U350.19@994,1611.15 v2@994,1685.83 ; C350.2 C351.1 994.32,1685.83 v2(994,1686.15) 948.37,1686.15 ; v2(1275.79,1576.46) R304.2 ; v2(1380.79,1471.15) 1401.73,1492.09 1421.42,1492.09 ; C304.1 v2(1545.47,1303.32) 1545.47,1351.15 ; C300.2 v2(1475.79,1736.46) ; U300.13 1421.42,1492.09 ; U300.12 1441.1,1511.78 1421.42,1492.09 ; C303.1 R302.1 1545.47,1351.15 ; U300.3 1680.79,1531.46 v2(1700.79,1511.46) ; U300.5 1575.63,1571.46 1670.79,1571.46 v2(1695.79,1596.46) ; 1641,1351.46 1640.68,1351.78 ; C301.2 1655.79,1380.15 1655.79,1366.88 1640.68,1351.78 ; U1.4 U1.9@2110,893.47 ; v2(2110,893) U1.9@2110,893.47 ; v2(2110,948) U1.9 U1.9@2110,893.47 ; v2(2140,1128) 2141.85,1126.15 C1.1 ; U1.5 U1.9@2110,893.47 ; C107.1@2497.15,479.58 C107.1 ; C103.1@2499.15,1065.06 C103.1 ; C105.1@2501.15,673 C105.1 ; C101.1@2503.15,883.35 C101.1 ; U103.7@2664,564.58 U103.5 ; U101.7@2666,1150.06 U101.5 ; U102.7@2668,758 U102.5 ; U100.7@2670,968.35 U100.5 ; U400.15 3180.12,360.8 3204.31,385 v1(3225,385) ; 129,253 148,253 ; 784,1491.15 v2(784,1426.15) 869,1426.15 ; 784,1491.15 784,1511.15 ; 869,1426.15 889,1426.15 ; 869.63,1686.15 889.32,1686.15 ; 889.32,1686.15 909,1686.15 ; 909,1686.15 928.68,1686.15 ; 928.68,1686.15 948.37,1686.15 ; 1545.47,1351.15 1546.1,1351.78 C302.1 1640.68,1351.78
  Bottom Signal w15: J1.6 v1(895.67,790) ; J1.12 v1(990.16,790) ; v1(1021.65,323) J1.13 ; J1.18 v1(1084.65,790) ; v1(1116.14,323) J1.19 ; J1.24 1180,695.75 v1(1180,790) ; v1(1210.63,323) J1.25 ; J1.30 1275,696.26 v1(1275,790) ; v1(1305.12,323) J1.31 ; v1(1399.61,323) J1.37 ; J1.40 v1(1431.1,790) ; v1(1494.09,323) J1.43 ; J1.46 v1(1525.59,790) ; v1(1588.58,323) J1.49 ; J1.52 v1(1620.08,790) ; v1(1683.07,323) J1.55 ; J1.58 v1(1714.57,790)
  other v1: 1595,115 1415,155 1100,170 1260,170
  other v3: 2155,413.35 2155,456.65 2664,542.93 2664,586.24 2170,616.06 2170,659.37 2668,736.35 2668,779.65 2670,946.69 2670,990 2666,1128.41 2666,1171.72
sGPIO_0/sIND2: J2.5 U3.1 | length 136.1
  Inner Layer 1 w5: 551.18,1793 J2.5
  other v1: 1165,180
sGPIO_1/sSW2: D1.1 J2.7 SW2.3 SW2.4 | length 136.1
  Inner Layer 1 w5: 629.92,1793 J2.7
sGPIO_2/sIND1: J2.3 U2.1 | length 136.1
  Inner Layer 1 w5: 472.44,1793 J2.3
  other v1: 1015,175
sGPIO_3/sSW4: D2.1 J2.9 SW4.3 SW4.4 | length 136.1
  Inner Layer 1 w5: 708.66,1793 J2.9
sGPIO_12/sSW1: D1.2 J2.24 SW1.3 SW1.4 | length 238.1
  Inner Layer 1 w5: J2.24 1299,1968.72 1299,1786
sGPIO_13/sCAM0_STROBE: J2.25 J500.18 U400.1 | length 231.6
  Top Signal w5: v1(2969.45,859.45) J500.18 ; v1(2985,45) 3005,65 3020,65 3035.04,80.04 U400.1
sGPIO_16/sGYRO_INT2: J2.16 U350.2 | length 109.7
  Top Signal w8: v2(774,1651.15) 774,1606.15 789.63,1590.52 U350.2
sGPIO_17/sAG_INT2: J2.10 R300.2 U300.9 | length 397.9
  Top Signal w8: v2(1346.1,1626.15) 1346.73,1626.78 R300.2 1415.79,1596.46 1441.42,1570.83 U300.9
  Inner Layer 1 w5: 670,1798 670,1912.24 669.63,1912.6 669.63,1968.85 J2.10
sGPIO_18/sGYRO_INT1: J2.12 U350.3 | length 168.7
  Top Signal w8: v2(674,1596.15) 744,1596.15 769.32,1570.83 U350.3
sGPIO_19/sAG_INT1: J2.8 R301.2 U300.11 | length 324.6
  Top Signal w8: R301.2 1426.1,1526.46 1431.1,1531.46 U300.11
  Inner Layer 1 w5: 590,1798 590,1912.55 590.21,1912.76 590.21,1968.16 J2.8
sGPIO_24/sIND4: J2.29 U5.1 | length 136.1
  Inner Layer 1 w5: 1496.06,1793 J2.29
  other v1: 1480.79,184.63
sGPIO_28/sCAM1_RESET: J2.33 J501.1 J601.6 U401.6 | length 444.4
  Top Signal w5: U401.6 211.13,73.87 v1(215,70) ; J501.1 324.96,1106.22 v1(333.74,1115) ; J601.6 336.96,1809.68 356.64,1829.37 v1(390.63,1829.37)
  Inner Layer 1 w5: 1653.54,1793 J2.33
sGPIO_33/sCAM1_PWDN: J2.34 J601.8 U401.8 | length 405.4
  Top Signal w5: v1(242.62,68.17) U401.8 ; J601.8 325.31,1770.31 330,1775 v1(381.85,1775)
  Inner Layer 1 w5: J2.34 1692.57,1968.85 1692.57,1824.57 1692,1824
sGPIO_34/sCAM0_PWDN: J2.32 J600.8 U400.8 | length 459.7
  Top Signal w5: v1(2949.26,1376.57) J600.8 ; v1(3148.62,33.62) U400.8
  Inner Layer 1 w5: J2.32 1614,1968.68 1614,1797
sGPIO_35/sCAM0_RESET: J2.31 J500.1 J600.6 U400.6 | length 481.7
  Top Signal w5: v1(2937.8,1337.2) J600.6 ; v1(2979.8,524.8) J500.1 ; U400.6 3117.13,60.5 v1(3125,52.63)
  Inner Layer 1 w5: 1574.8,1793 J2.31
sGPIO_36/sLDO_S\H\D\N\: J2.23 R2.2 | length 266.4
  Top Signal w8: v2(2115,813) 2115.63,813.63 R2.2
  Inner Layer 1 w5: 1259.84,1793 J2.23
sGPIO_69/sCAM1_STROBE: J2.26 J501.18 U401.1 | length 420.4
  Top Signal w5: v1(129.04,61.3) U401.1 ; J501.18 354.96,771.57 v1(364.06,780.67)
  Inner Layer 1 w5: J2.26 1378.29,1968.16 1378.29,1800.29 1378,1800
sGPIO_110/sCAM1_VSYNC: J2.14 J501.24 J601.7 | length 233.3
  Top Signal w5: J501.24 v1(355,653.46) ; J601.7 355,1790 v1(370,1805)
sGPIO_114/sCAM0_VSYNC: J2.20 J500.24 J600.7 | length 237.9
  Top Signal w5: v1(2967.6,1356.89) J600.7 ; v1(2987.56,977.56) J500.24
sGPIO_115/sIND3: J2.27 U4.1 | length 136.1
  Inner Layer 1 w5: 1417.32,1793 J2.27
  other v1: 1320,185
sGYRO_SA0: R351.1 U350.13 | length 77.8
  Top Signal w8: U350.13@994,1491.15 994,1471.15 1014.32,1450.83 R351.1
sI2C0_SCL: J2.15 U300.4 U350.11 | length 268.4
  Top Signal w5: v1(926.03,1368.15) 928.68,1370.81 U350.11
  Top Signal w8: U300.4 1735.79,1551.15 v2(1735.79,1551.46)
sI2C0_SDA: J2.17 U300.6 U350.12 | length 361.8
  Top Signal w5: U350.12 948.37,1370.81 v1(951.03,1368.15)
  Top Signal w8: U300.6 1545.47,1631.15 1575.47,1661.15 v2(1737,1661.15)
sI2C1_SCL: J2.19 R13.1 | length 136.1
  Inner Layer 1 w5: 1102.36,1793 J2.19
sI2C1_SDA: J2.21 R16.1 | length 136.1
  Inner Layer 1 w5: 1181.1,1793 J2.21
sI2C2_SCL: J1.32 R12.1
  other v1: 1305.12,883
sI2C2_SDA: J1.34 R14.1
  other v1: 1336.61,883
sI2C3_SCL: J1.36 R15.1
  other v1: 1368.11,883
sI2C3_SDA: J1.38 R17.1
  other v1: 1399.61,883
sMPP_4/sSW3: D2.2 J2.28 SW3.3 SW3.4 | length 226.3
  Inner Layer 1 w5: J2.28 1457,1968.2 1457,1798
sPOWER: D3.2 J2.4 POWER.3 POWER.4
sPWR_1V2a: C109.2 J600.10 R104.1 TP107.1 U104.1 | length 166.8
  Top Signal w5: v1(2935,1430) 2949.06,1415.94 J600.10
sPWR_1V2b: C111.2 J601.10 R105.1 TP108.1 U105.1 | length 130.1
  Top Signal w5: J601.10 v1(379.06,1730.94)
sPWR_1V5a: C101.2 C405.2 C407.1 C505.2 C507.1 J500.14 R100.1 TP100.1 U100.1 U400.10 | length 266.5
  Top Signal w5: v1(3025,780) 3025.71,780.71 J500.14 ; v1(3175,55) 3180.12,60.12 U400.10
  Top Signal w8: C101.2 2506.54,993.03 R100.1 2585.91,993.94 U100.1
sPWR_1V5b: C103.2 C413.2 C415.1 C513.2 C515.1 J501.14 R101.1 TP102.1 U101.1 U401.10 | length 291.1
  Top Signal w5: J501.14 325.32,850.32 v1(335,860) ; v1(274.12,65) U401.10
  Top Signal w8: C103.2 2502.54,1174.75 R101.1 2581.91,1175.65 U101.1
sPWR_1V8: C4.2 C6.2 C302.2 C351.2 C404.1 C406.2 C412.1 C414.2 C504.1 C506.2 C512.1 C514.2 J2.35 J5.2 J500.15 J501.15 J600.11 J601.11 R11.2 R300.1 R301.1 R303.2 R350.1 TP15.1 U300.1 U350.18 U400.11 U401.11 | length 1063.1
  Top Signal w5: J501.15 v1(330.63,830.63) ; J601.11 v1(403.74,1711.26) ; U401.11 289.87,85.13 v1(310,65) ; v1(2980.83,1435.63) J600.11 ; v1(3005.39,800.39) J500.15 ; U400.11@3194.15,117.73 U400.11 v1(3195.87,35)
  Top Signal w8: v2(702,1509.15) 727,1509.15 R350.1 ; U350.18 v2(1049,1590.52) C351.2 ; v2(1275.79,1526.46) R301.1 ; v2(1345.79,1666.46) 1346.1,1666.15 R300.1 ; R303.2 1580.47,1711.15 v2(1580.79,1711.46) ; U300.1 1575,1462.25 v2(1600.79,1436.46) C302.2
sPWR_2V8a: C105.2 C400.1 C402.2 C408.1 C410.2 C500.1 C502.2 C508.1 C510.2 J500.16 J501.16 J600.4 J601.4 R102.1 TP103.1 U102.1 U400.4 U401.4 | length 491
  Top Signal w5: J501.16 v1(307.94,810.94) ; J601.4 v1(302,1849.06) ; v1(3025,35) 3025,38 3029.38,33.62 3057.97,33.62 3085.63,61.28 U400.4 ; v1(3031.71,1297.83) J600.4 ; v1(3045.08,820.08) J500.16
  Top Signal w8: C105.2 2504.54,782.68 R102.1 2583.91,783.59 U102.1
sPWR_2V8b: C107.2 C401.2 C403.1 C409.2 C411.1 R103.1 TP104.1 U103.1 U400.23 U401.23 | length 305.9
  Top Signal w5: U401.23 v1(148.13,411.87) ; U400.23 3054.13,250.87 3072,233 v1(3083,233)
  Top Signal w8: C107.2 2500.54,589.27 R103.1 2579.91,590.17 U103.1
sPWR_3V3: C2.2 C303.2 C304.2 C352.2 C353.1 J4.2 R3.2 R4.2 R5.2 R6.2 TP3.1 U1.1 U1.2 U1.3 U300.14 U350.15 U350.17 | length 844
  Top Signal w8: U350.17 958.68,1570.83 949,1561.15 949,1541.15 958.68,1531.46 U350.15 1105.5,1531.46 C352.2 1165.5,1530.83 C353.1 1176.81,1542.15 v2(1213,1542.15) ; v2(1376,1412.15) 1428.25,1412.15 C304.2 1437.32,1416.15 C303.2 U300.14 ; U1.3 2012.83,913.16 C2.2 ; U1.2 C2.2 ; U1.1 2012.83,952.53 C2.2
  Top Signal w15: v1(985,60) R3.2 ; v1(1145,65) 1145.79,65.79 R4.2 ; v1(1300,65.79) R5.2 ; v1(1470,60) R6.2
sPWR_5V0: C1.2 C3.2 C5.2 C100.2 C102.2 C104.2 C106.2 C108.2 C110.2 J2.37 R1.2 TP14.1 TP101.1 U1.7 U1.8 U100.4 U100.6 U101.4 U101.6 U102.4 U102.6 U103.4 U103.6 U104.4 U104.6 U105.4 U105.6 | length 1068.3
  Top Signal w8: U1.7 U1.8 2205,952.53 2220.47,968 v2(2240,968) ; C1.2 v2(2240,968) ; R1.2@2345.63,968 v2(2240,968) ; R1.2 2400,1017.37 v2(2400,1045) ; U103.4 2765.85,538.99 2765.85,564.58 2765.85,590.17 U103.6 ; U101.4 2767.85,1124.47 2767.85,1150.06 2767.85,1175.65 U101.6 ; U102.4 2769.85,732.41 2769.85,758 2769.85,783.59 U102.6 ; U100.4 2771.85,942.76 2771.85,968.35 2771.85,993.94 U100.6
  Top Signal w15: R1.2@2345.63,968 R1.2@2350,972.37
sRESET: D3.1 J2.6 RESET.3 RESET.4
sSYS_DCIN: J2.36 J2.38 J3.1
sUART1_RX/sEXTERNAL_TX: J2.13 R10.2 | length 136.1
  Inner Layer 1 w5: 866.14,1793 J2.13
sUART1_TX/sEXTERNAL_RX: J2.11 R8.2 | length 136.1
  Inner Layer 1 w5: 787.4,1793 J2.11
pads on no net: J1.0 J1.1 J1.3 J1.5 J1.7 J1.9 J1.11 J1.20 J1.21 J1.22 J1.23 J1.26 J1.27 J1.28 J1.29 J1.33 J1.35 J1.39 J1.41 J1.45 J1.47 J1.51 J1.53 J1.57 J1.59 J1.60 J2.18 J2.22 J2.30 J6.2 J6.6 J500.0 J500.19 J500.20 J500.21 J500.22 J500.23 J501.0 J501.19 J501.20 J501.21 J501.22 J501.23 J600.0 J600.1 J601.0 J601.1 U100.2 U100.7@2670,950.63 U100.7@2670,986.06 U101.2 U101.7@2666,1132.35 U101.7@2666,1167.78 U102.2 U102.7@2668,740.28 U102.7@2668,775.72 U103.2 U103.7@2664,546.87 U103.7@2664,582.3 U104.2 U104.7@2155,417.28 U104.7@2155,452.72 U105.2 U105.7@2170,620 U105.7@2170,655.43 U300.15 U400.7 U400.9 U400.17 U400.19 U400.21 U401.7 U401.9 U401.17 U401.19 U401.21

## Polygon pours and split planes (outlines as drawn)
sGND on Ground Plane (GND) (split plane): 3326.36,20.1 20.1,20.1 20.1,2105.89 3326.36,2105.89
sPWR_1V8 on Power Plane (VCC) (split plane): 3326.36,20.1 20.1,20.1 20.1,2105.89 3326.36,2105.89

## Keep-outs
Keep-Out Layer:
  lines w10: 0,0 0,2125 3345,2125 3345,0 0,0

## Silkscreen, mask and mechanical layers (free items; w line width, h text height)
Top Overlay:
  lines w5: -540,2705 -530,2715 ; -520,2705 -530,2715 ; -440,2605 -430,2615 ; -440,2625 -430,2615 ; 59,-1 59,34 19,74 19,389 419,389 419,69 384,34 384,-1 ; 714.32,1452.92 724.32,1462.92 ; 734.32,1452.92 724.32,1462.92 ; 814.32,1352.92 824.32,1362.92 ; 814.32,1372.92 824.32,1362.92 ; 1265.79,1456.46 1275.79,1466.46 ; 1285.79,1456.46 1275.79,1466.46 ; 1365.79,1356.46 1375.79,1366.46 ; 1365.79,1376.46 1375.79,1366.46 ; 2965,-20 2965,15 2925,55 2925,370 3325,370 3325,50 3290,15 3290,-20 ; -530,2715 -530,2615 -430,2615 ; 724.32,1462.92 724.32,1362.92 824.32,1362.92 ; 1275.79,1466.46 1275.79,1366.46 1375.79,1366.46
  text "Y" at -580,2665 h30
  text "X" at -480,2565 h30
  text "2732" at 3045,1665 h30 r90
  text "2732" at 306.02,1466.89 h30 r270
  text "Y" at 1225.79,1416.46 h30
  text "Y" at 674.32,1412.92 h30
  text "X" at 1325.79,1316.46 h30
  text "X" at 728.32,1305.92 h30
  text "7251" at 3046.02,951.02 h30 r90
  text "7251" at 305,665 h30 r270
  text "CTS" at 1815,166 h30 r90
  text "TX" at 1918,166 h30 r90
  text "RX" at 2021,166 h30 r90
  text "1.8V" at 2124,166 h30 r90
  text "RTS" at 2227,166 h30 r90
  text "GND" at 2330,166 h30 r90
Mechanical 1:
  the board outline again, w7.87

## Dimensions
0,0 to 3346.46,0 on Mechanical 1
0,0 to 0,2125.98 on Mechanical 1

## Text inside footprints (layer, text, board x,y; h text height)
J2: Bottom Overlay "39" at 1968.7,1954.13 h50 r180; Bottom Overlay "40" at 1968.7,2039.13 h50 r180; Bottom Overlay "2" at 273.7,2034.13 h50 r180; Bottom Overlay "1" at 283.7,1949.13 h50 r180
U400: Top Overlay "1" at 3006.89,99.76 h30 r180; Top Overlay "12" at 3283.46,100.75 h30 r180; Top Overlay "24" at 3012.8,349.76 h30 r180; Top Overlay "13" at 3282.48,351.73 h30 r180
U401: Top Overlay "1" at 100.89,118.76 h30 r180; Top Overlay "12" at 377.46,119.75 h30 r180; Top Overlay "24" at 106.8,368.76 h30 r180; Top Overlay "13" at 376.48,370.73 h30 r180